# Altium PCB PCB_Stellaris.PcbDoc (part 1 of 3)
Units mm, origin at the board's own origin, x right, y up, seen from the top; angles counter-clockwise.
Board outline 50.8 x 63.5 mm, 6 copper layers (L1, L2 (GND), L3, L4, L5 (VCC), L6), stack 1.551 mm thick; 95 components, 90 nets, 373 pads, 126 vias.
Unrouted connection lines stored in the file: 1.
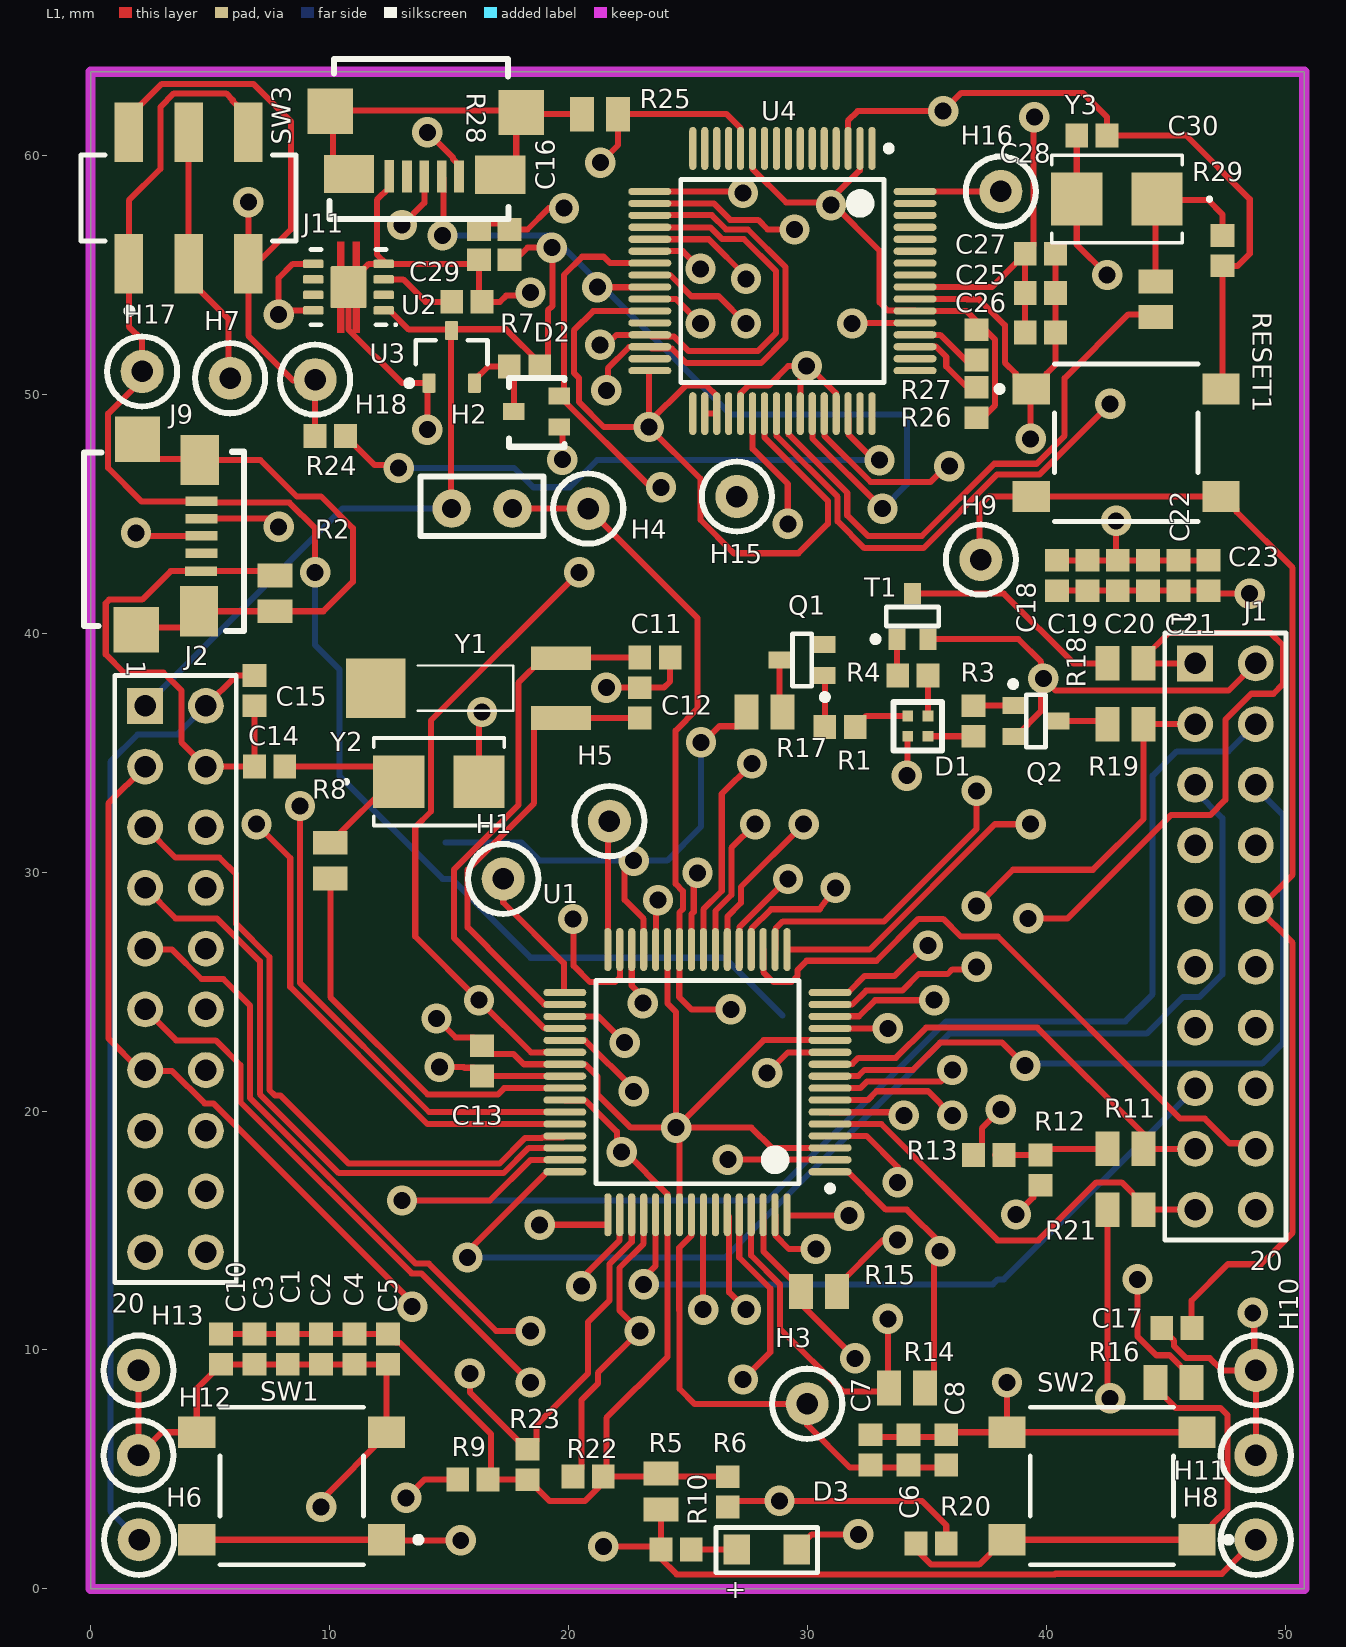
[diagram p0: L1 view]
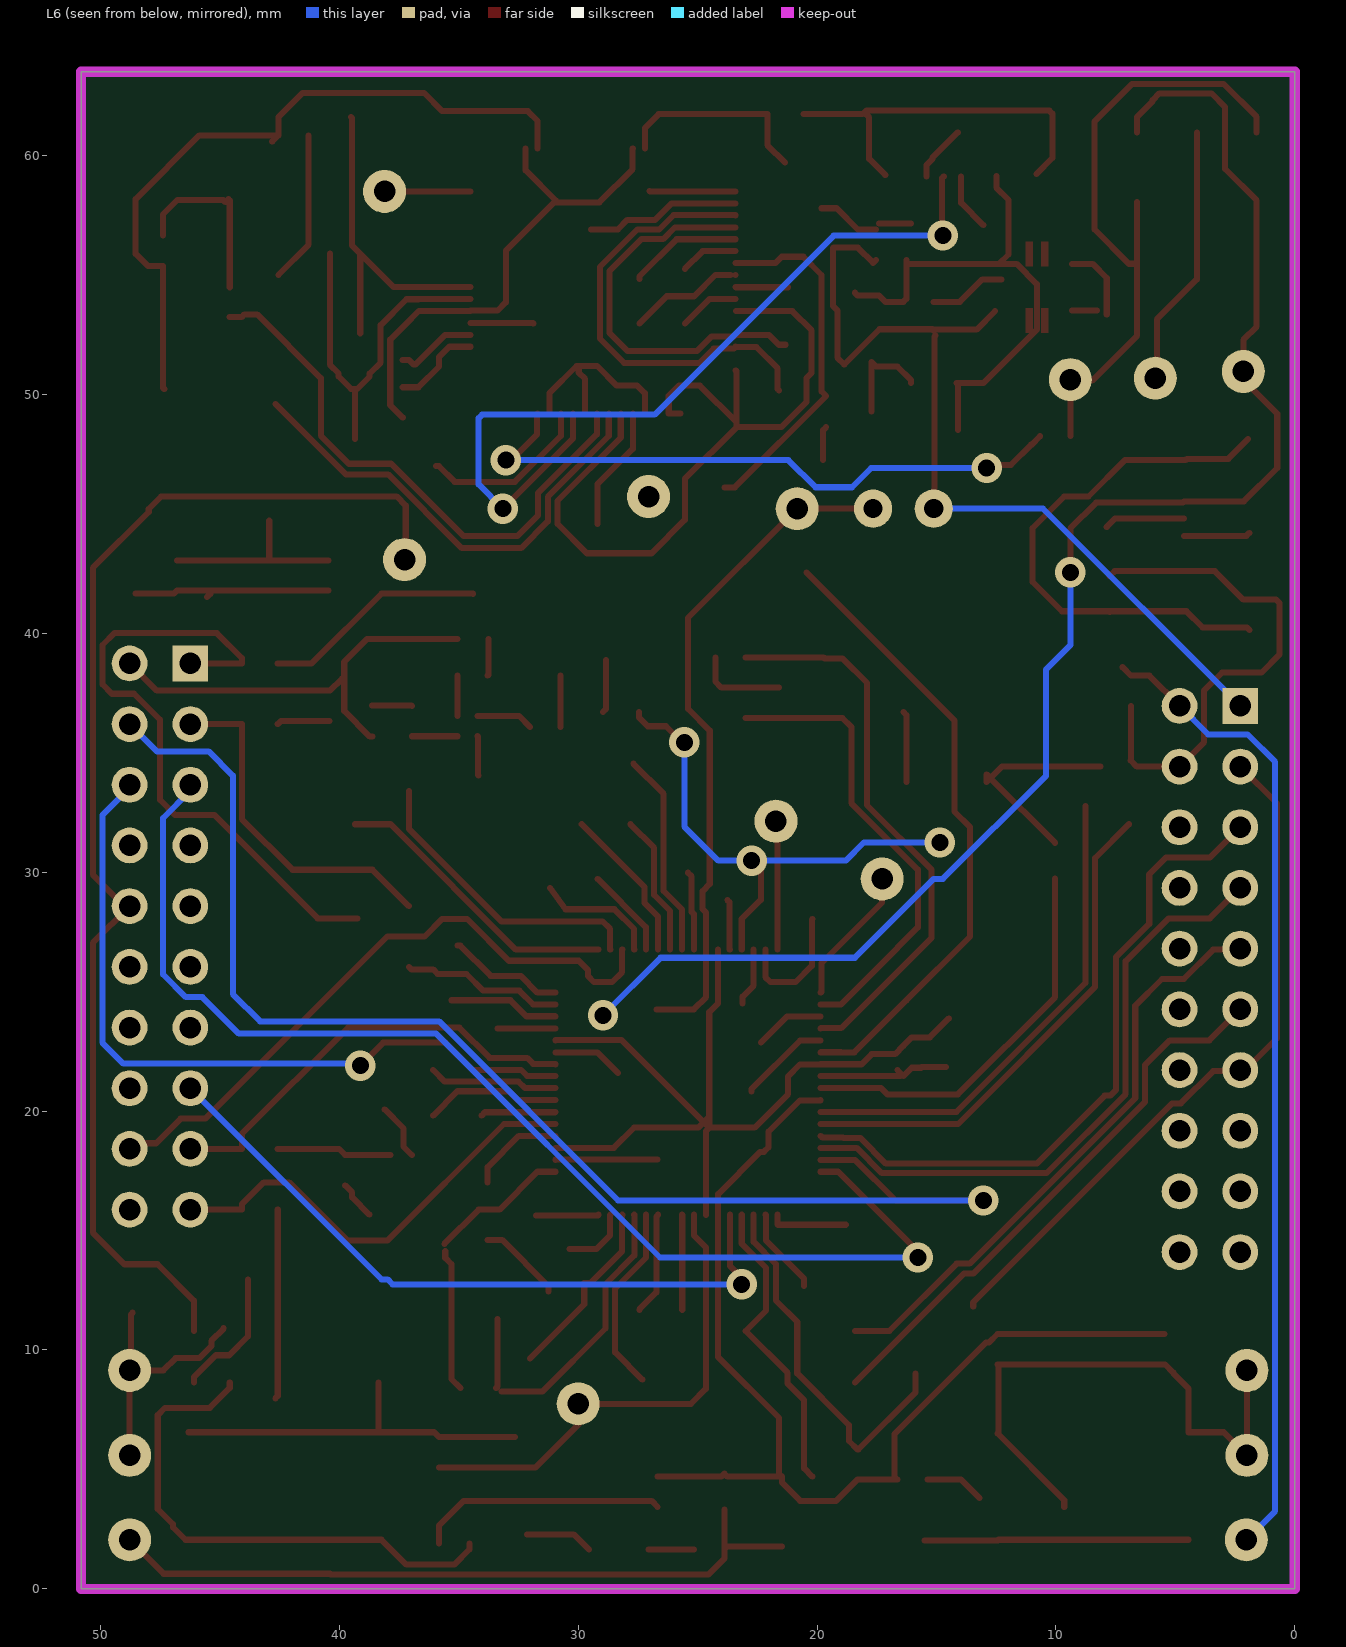
[diagram p1: L6 view, seen from below]
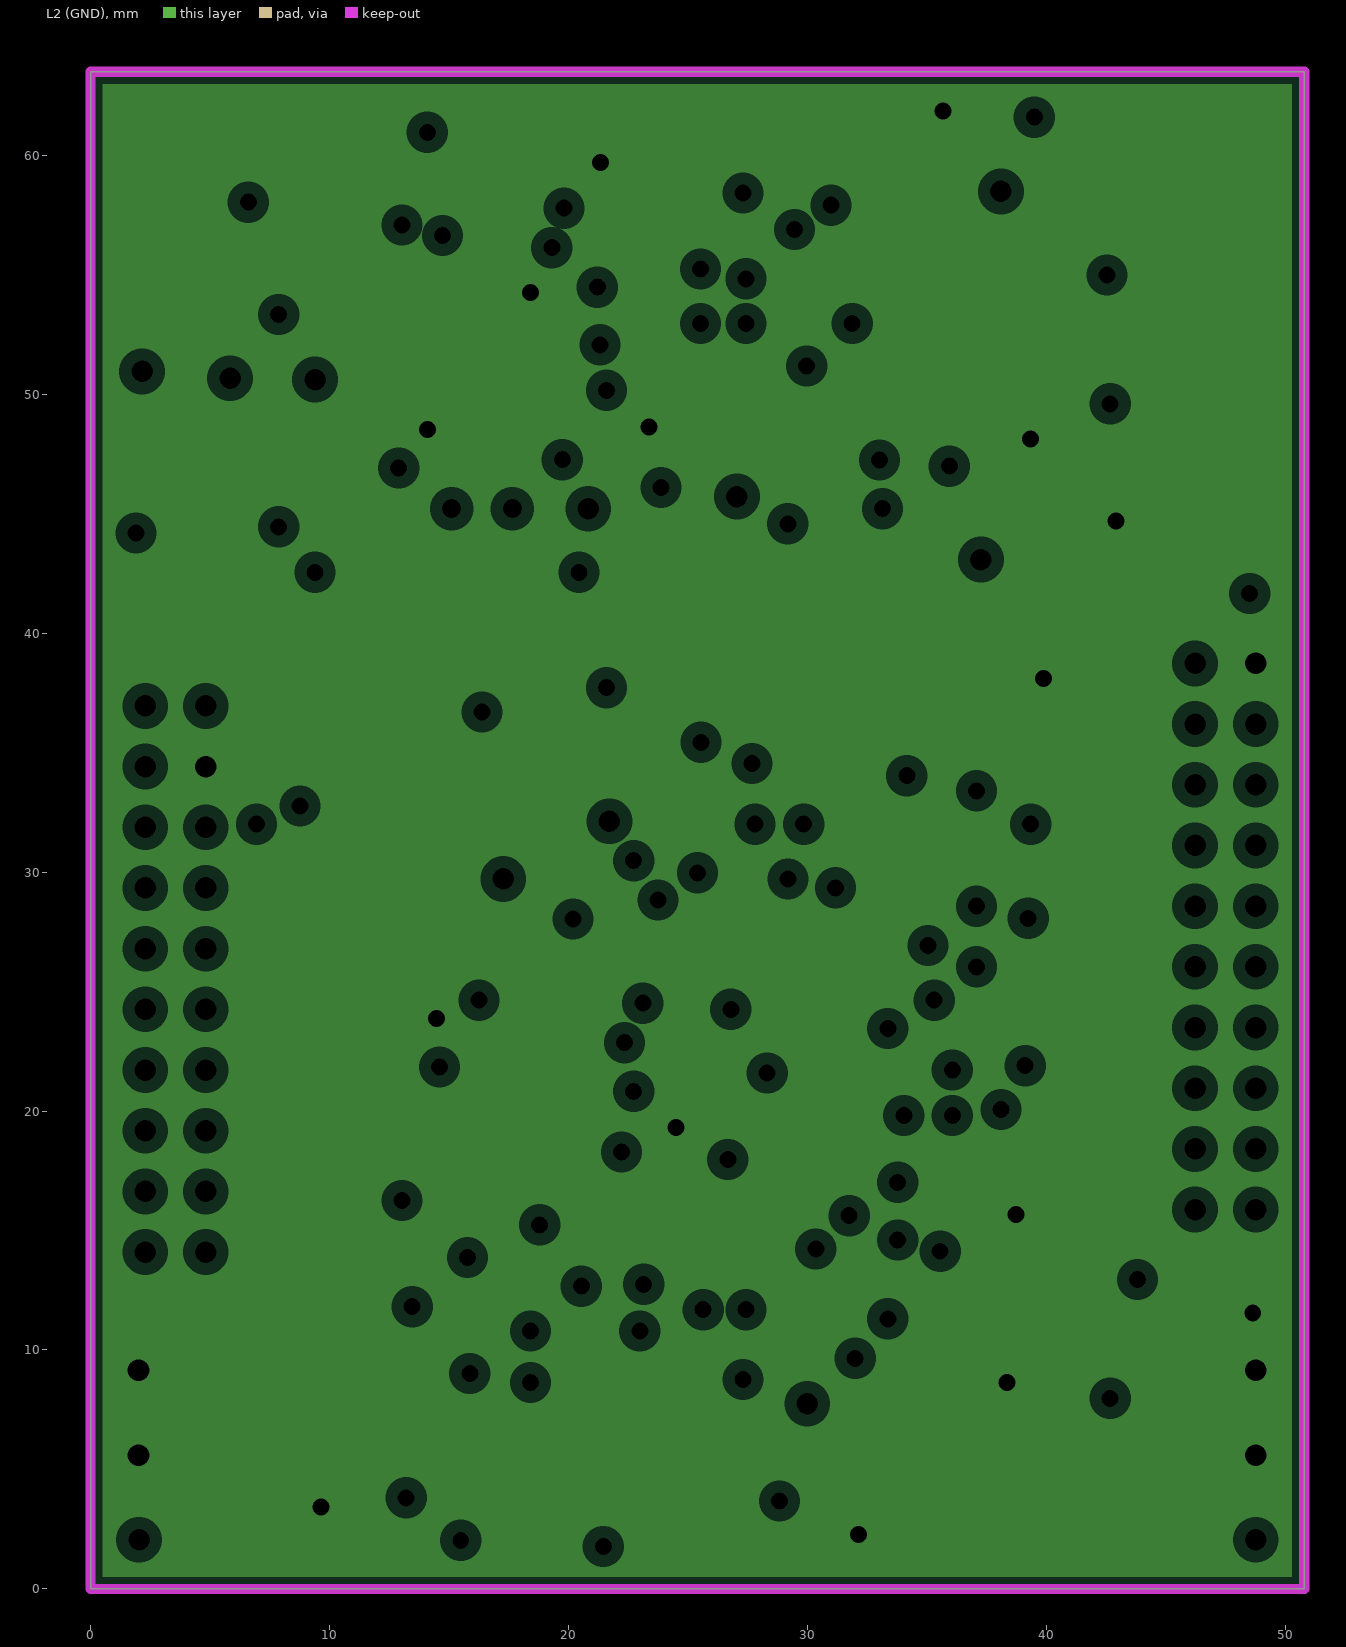
[diagram p2: L2 (GND), clearances drawn from the general rule]
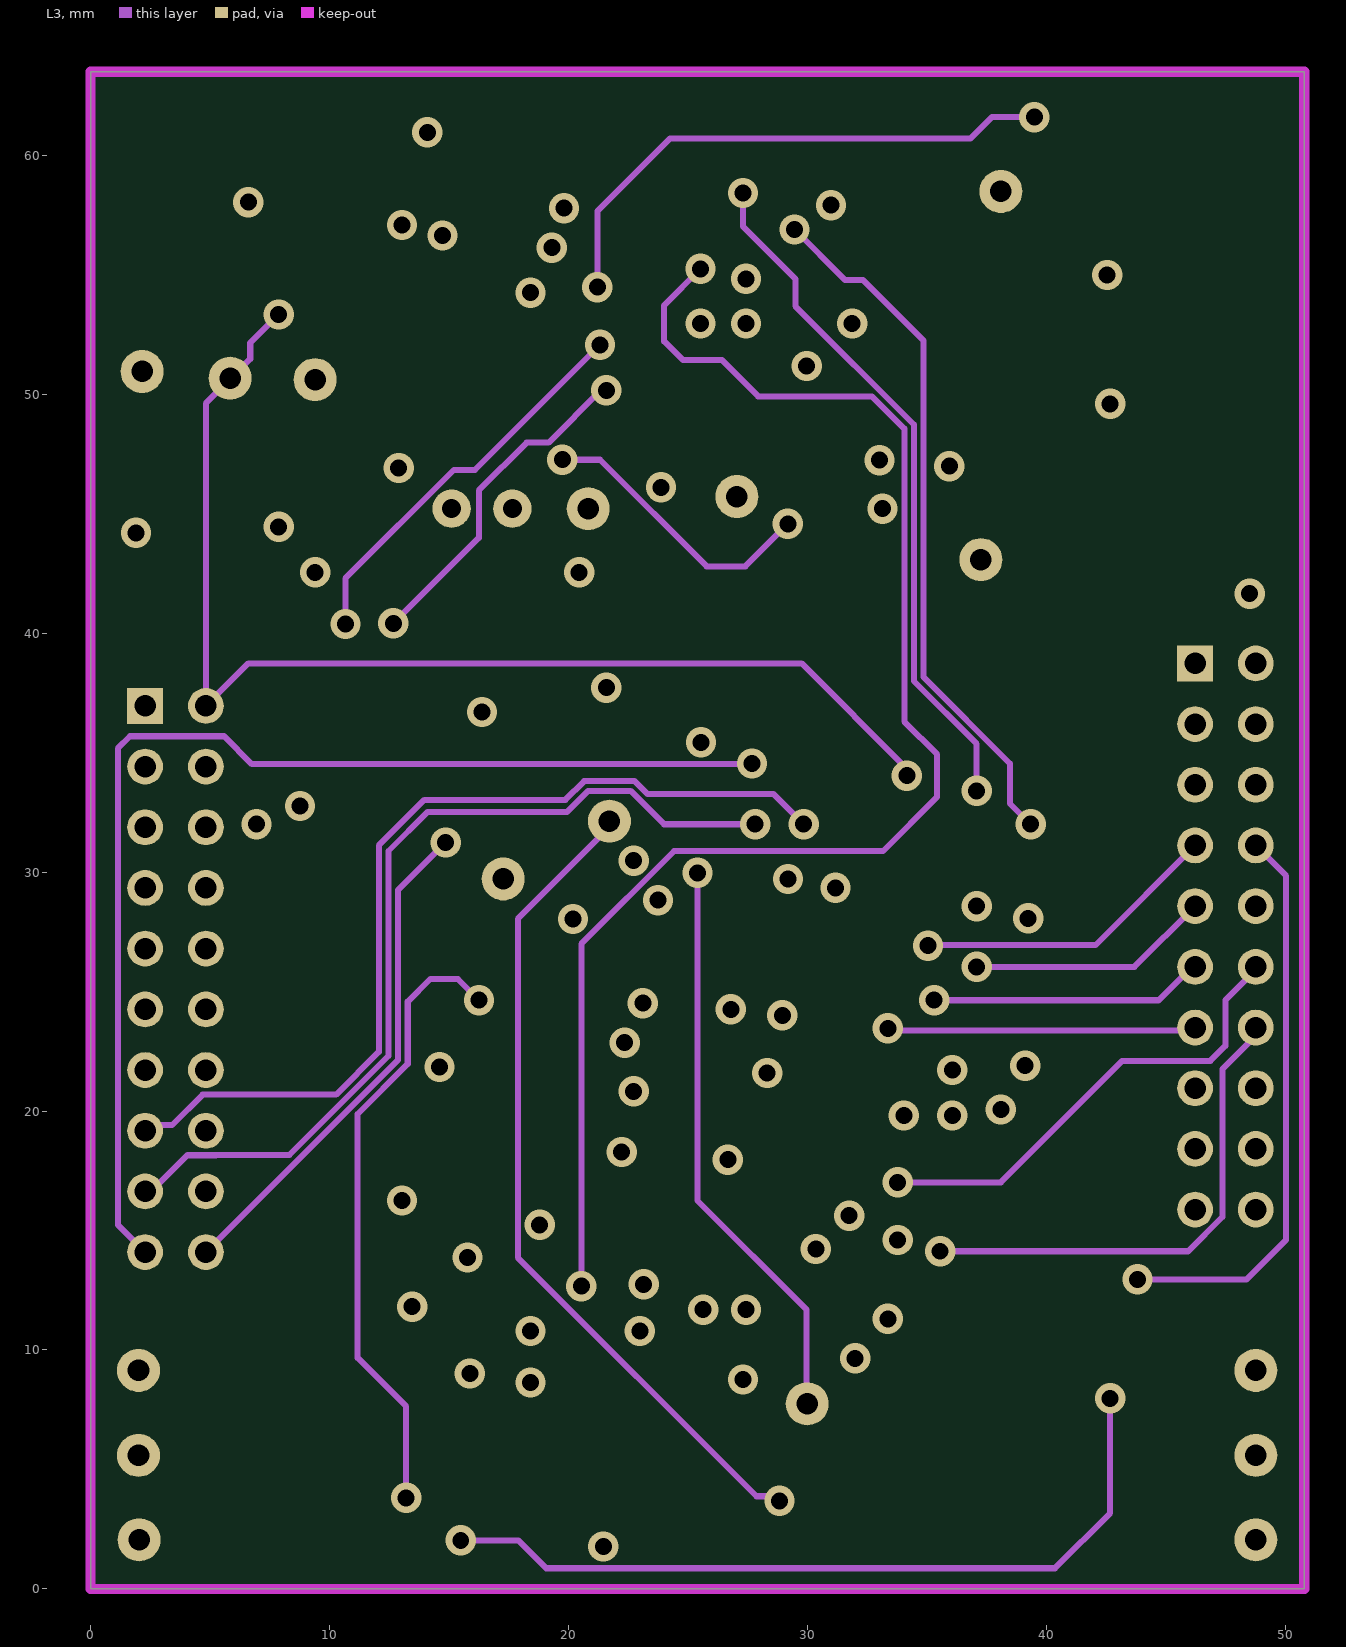
[diagram p3: L3]
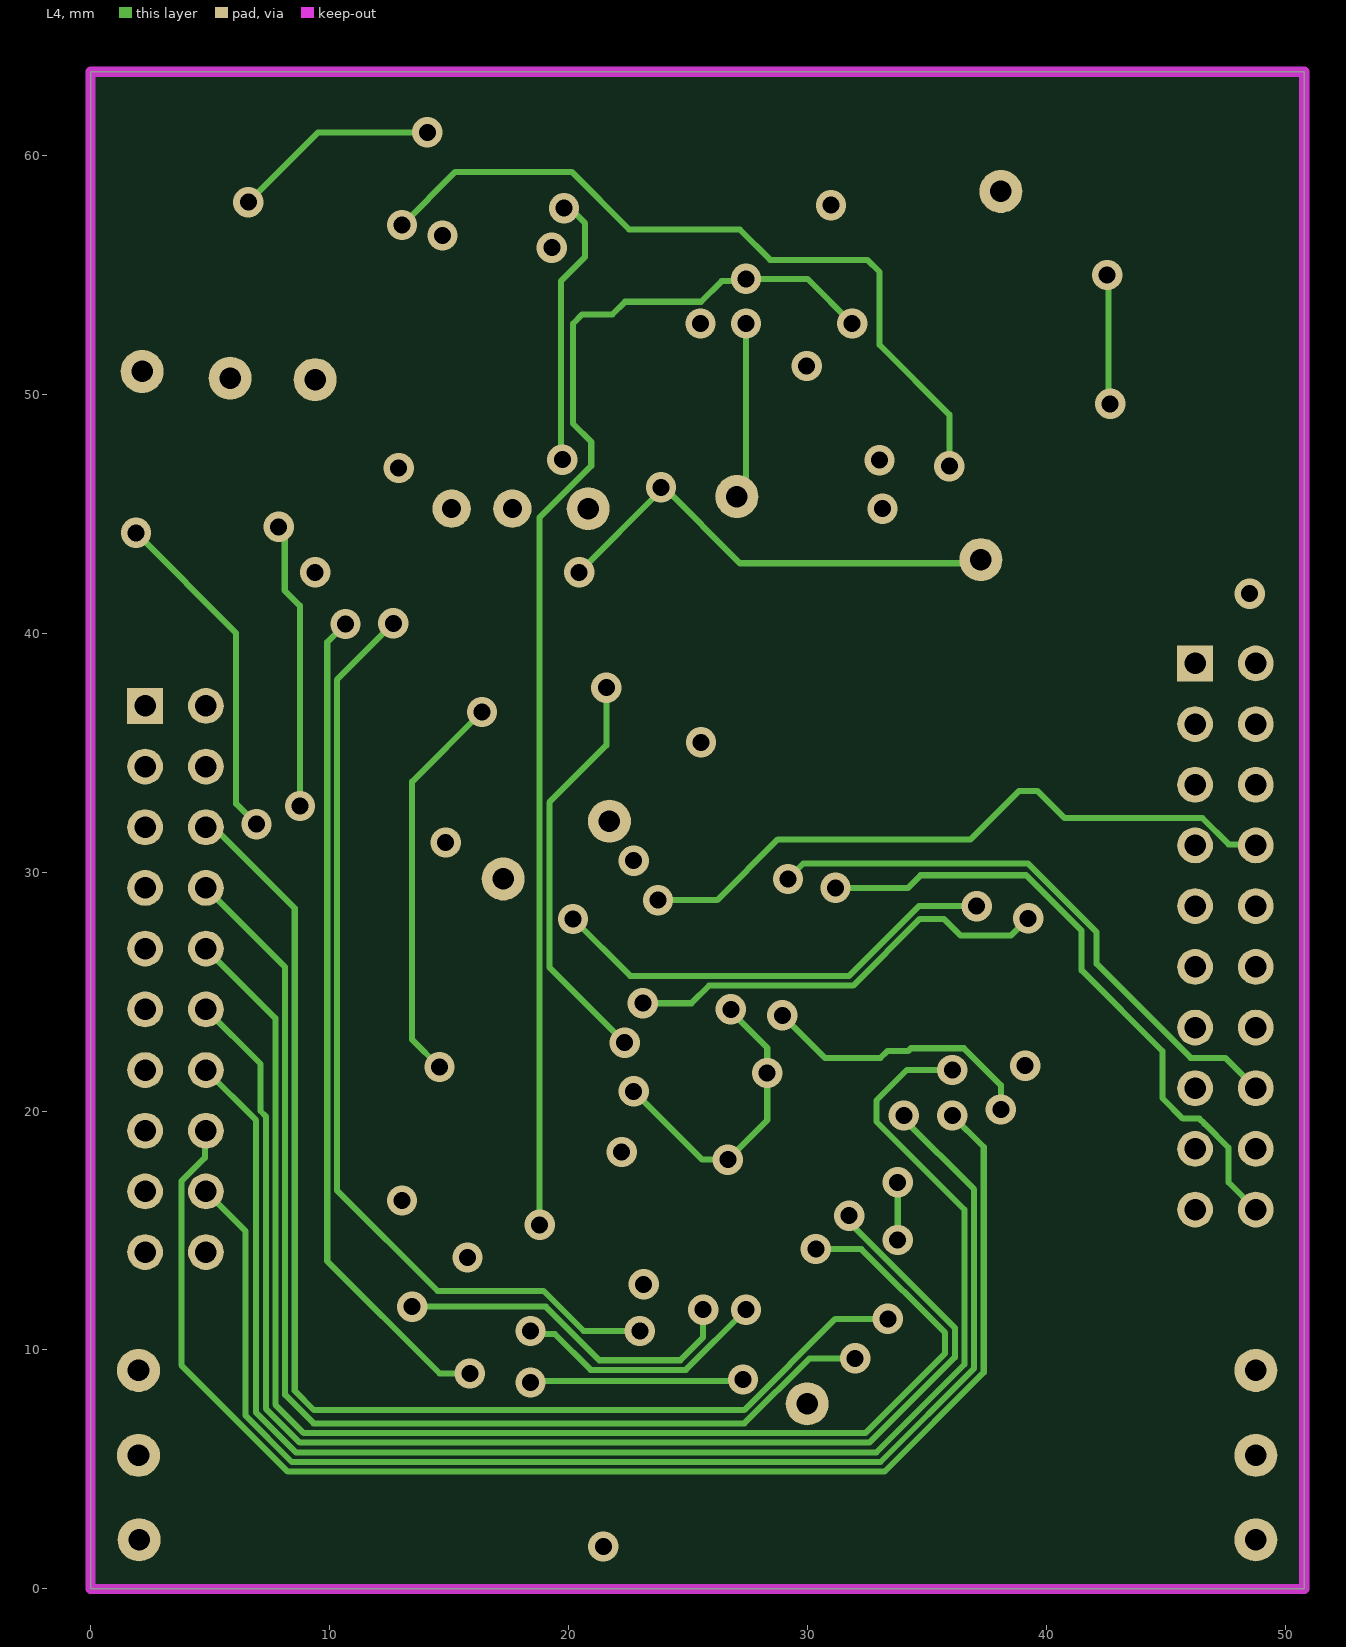
[diagram p4: L4]
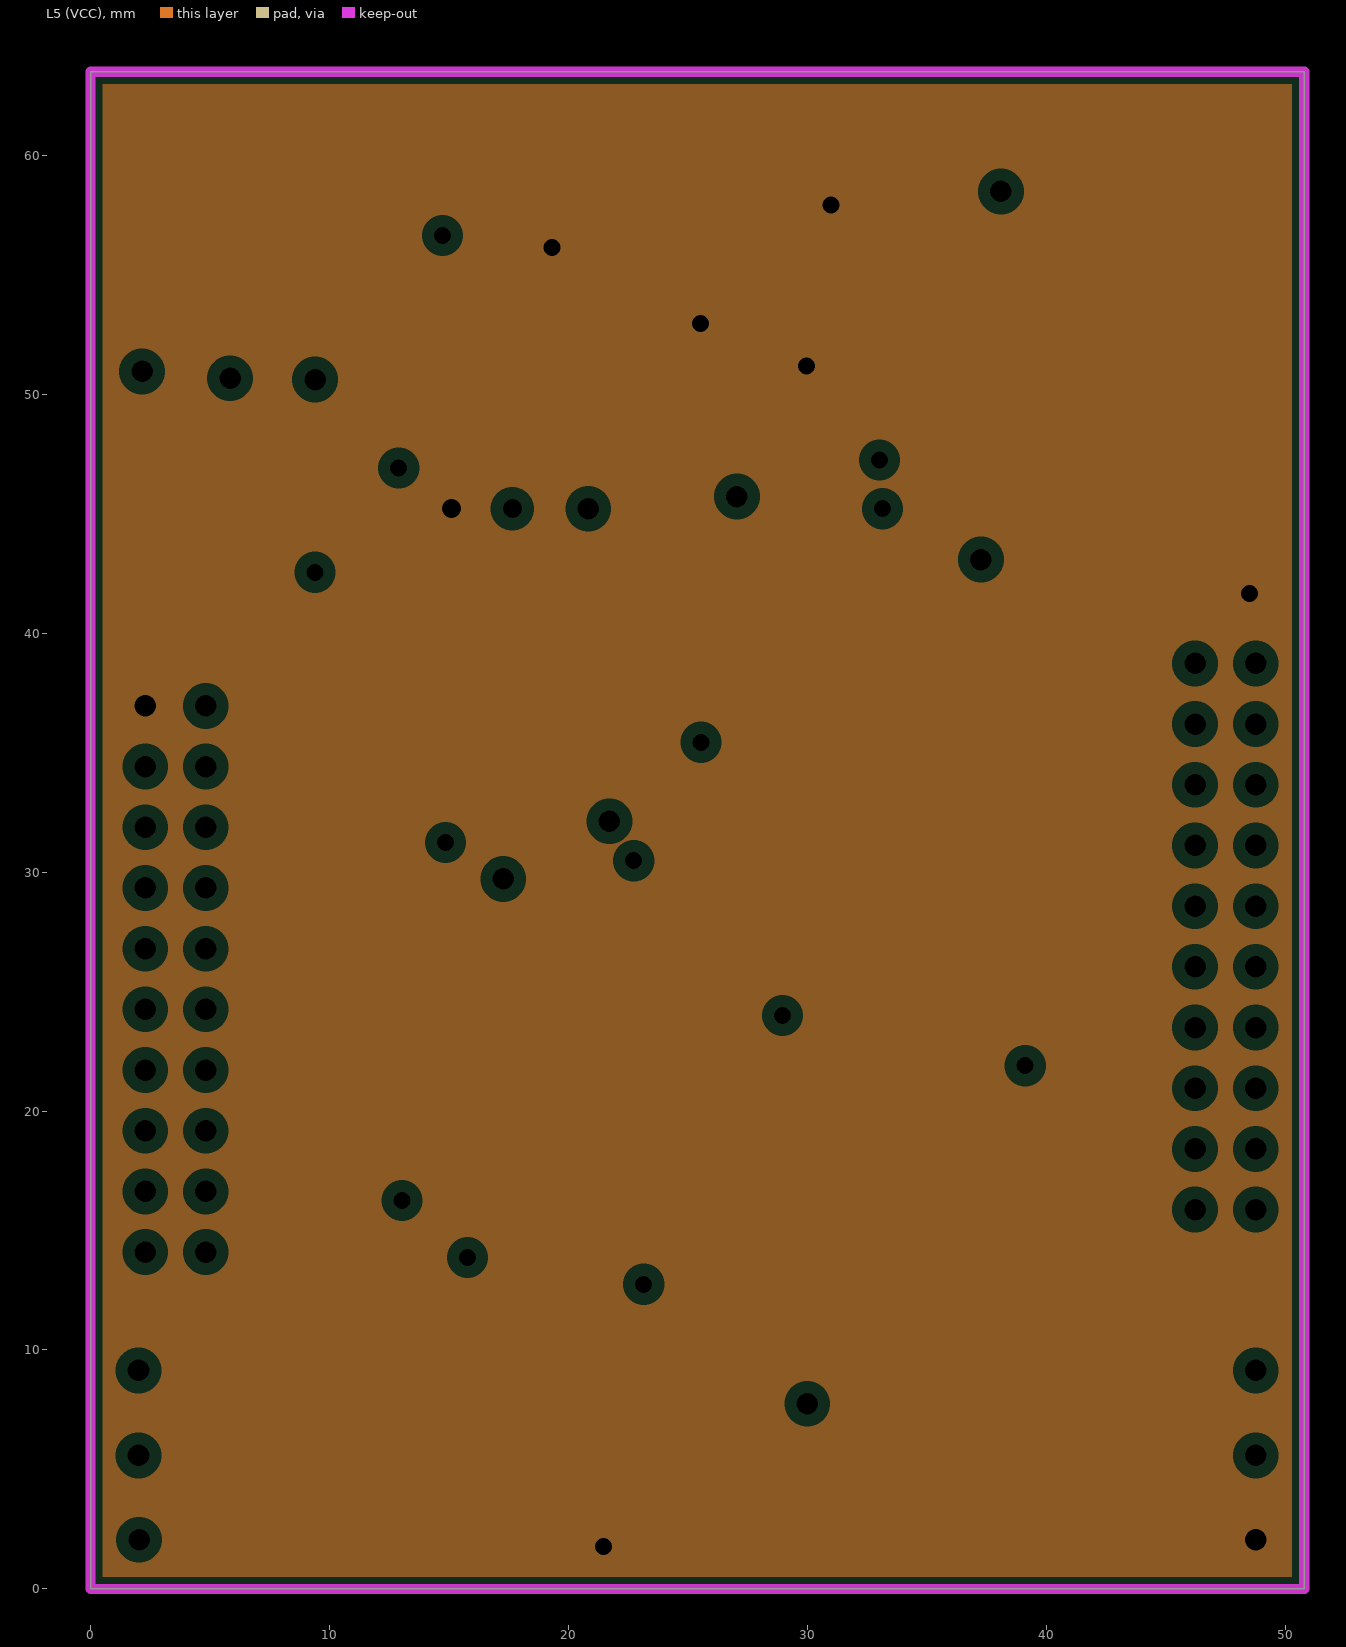
[diagram p5: L5 (VCC), clearances drawn from the general rule]
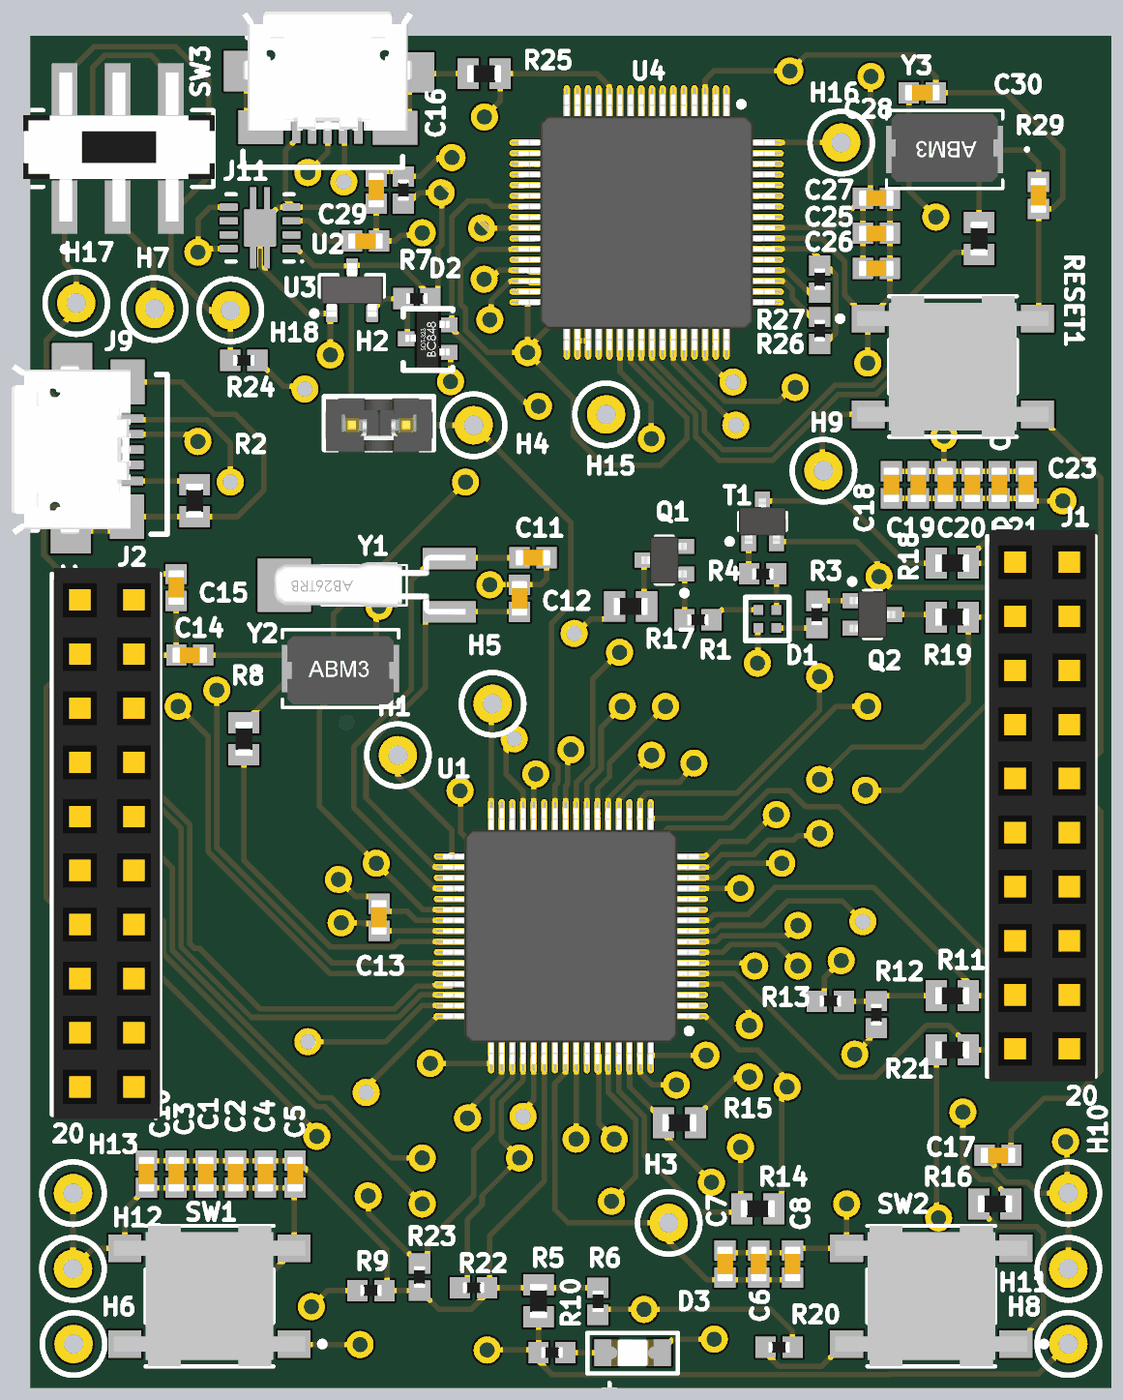
[diagram p7: 3D render of the assembled board from above, using the file's embedded part models]

## Layer stack, top to bottom
Top Solder: solder mask 0.0254, SM-001, Dk 4
L1: signal copper 0.035
Dielectric 1: prepreg 0.0711, PP-006, Dk 4.1
Dielectric 2: prepreg 0.0711, PP-006, Dk 4.1
L2 (GND): plane copper 0.035, net GND
Dielectric 3: core 0.4572, Core-035, Dk 4.7
L3: signal copper 0.035
Dielectric 4: prepreg 0.0711, PP-006, Dk 4.1
Dielectric 5: prepreg 0.0711, PP-006, Dk 4.1
L4: signal copper 0.035
Dielectric 6: core 0.4572, Core-035, Dk 4.7
L5 (VCC): plane copper 0.035, net +3.3V
Dielectric 7: prepreg 0.0711, PP-006, Dk 4.1
Dielectric 8: prepreg 0.0711, PP-006, Dk 4.1
L6: signal copper 0.035
Bottom Solder: solder mask 0.0254, SM-001, Dk 4

## Board outline
0,0 0,63.5 50.8,63.5 50.8,0

## Design rules (kind name [scope] priority, off if disabled: settings)
Clearance Clearance_1 [All] p1: gap=0.15 ignorepadtopadclearanceinfootprint=FALSE
HoleSize [All] p1: absolutevalues=TRUE maxlimit=6 minlimit=0.25 maxpercent=80.000 minpercent=20.000
Length [All] p1: maxlimit=2539.975 minlimit=0.1
MinimumAnnularRing [All] p1: minimumring=0.15
MinimumSolderMaskSliver [All] p1: minsoldermaskwidth=0.03
PlaneClearance [All] p1: clearance=0.508
PlaneConnect [All] p1: planeconnectstyle=Relief reliefexpansion=0.508 reliefentries=4 reliefconductorwidth=0.254 reliefairgap=0.254
PolygonConnect [All] p1: connectstyle=Relief reliefconductorwidth=0.254 reliefentries=4 polygonreliefangle="90 Angle" airgapwidth=0.254
RoutingVias [All] p1: holewidth=0.711 width=1.27 viastyle="Through Hole" minholewidth=0.711 minwidth=1.27 maxholewidth=0.711 maxwidth=1.27
SilkToSilkClearance [All] p1: silktosilkclearance=0
SilkToSolderMaskClearance [IsPad] p1: minsilkscreentomaskgap=0.03 clearancetoexposedcopper=TRUE
SolderMaskExpansion [All] p1: expansion=0.102
UnRoutedNet [All] p1: checkbadconnections=TRUE
Width [All] p1: maxlimit=0.254 minlimit=0.254 preferedwidth=0.254
23 further rules are at their usual default settings.

## Classes and differential pairs
component class ESQUEMATICOS2: C9 C18 C19 C20 C21 C22 C23 C25 C26 C27 C28 C29 C30 H15 H16 H17 H18 R22 R23 R24 R25 R26 R27 R28 R29 SW3 U4 U? Y3
component class ESQUEMATICOS1: * C1 C2 C3 C4 C5 C6 C7 C8 C10 C11 C12 C13 C14 C15 C16 C17 D1 D2 D3 H1 H2 H3 H4 H5 H6 H7 H8 H9 H10 H11 H12 H13 J1 J2 J9 Q1 Q2 R1 R2 R3 R4 R5 R6 R7 R8 R9 R10 R11 R12 R13 R14 R15 R16 R17 R18 R19 R20 R21 R30 R31 RESET1 SW1 SW2 T1 U1 U2 U3 Y1 Y2

## Components (designator, comment, footprint, x,y, rotation, side; value= is the part's Value field where it differs from the comment)
C1 "0.01uF" "CAP 0402" 8.255,10.033 r90 top
C2 "0.1uF" "CAP 0402" 9.652,10.033 r90 top
C3 "0.01uF" "CAP 0402" 6.858,10.033 r90 top
C4 "0.1uF" "CAP 0402" 11.049,10.033 r90 top
C5 "0.01uF" "CAP 0402" 12.446,10.033 r90 top
C6 "0.1uF" "CAP 0402" 34.227,5.819 r90 top
C7 "0.1uF" "CAP 0402" 32.639,5.819 r90 top
C8 "1.0uF" "CAP 0402" 35.814,5.819 r90 top
C10 "1.0uF" "CAP 0402" 5.461,10.033 r90 top
C11 "24pF" "CAP 0402" 23.622,38.989 r0 top
C12 "24pF" "CAP 0402" 22.987,37.084 r270 top
C13 "10pF" "CAP 0402" 16.383,22.098 r270 top
C14 "10pF" "CAP 0402" 7.493,34.417 r0 top
C15 "1.0uF" "CAP 0402" 6.858,37.592 r90 top
C16 "0.01uF" "CAP 0402" 15.748,53.869 r180 top
C17 "0.1uF" "CAP 0402" 45.466,10.922 r0 top
C18 "1.0uF" "CAP 0402" 40.457,42.413 r270 top
C19 "0.01uF" "CAP 0402" 41.724,42.413 r270 top
C20 "0.1uF" "CAP 0402" 42.991,42.413 r270 top
C21 "0.01uF" "CAP 0402" 44.258,42.413 r270 top
C22 "0.1uF" "CAP 0402" 45.525,42.413 r270 top
C23 "0.01uF" "CAP 0402" 46.792,42.413 r270 top
C25 "1.0uF" "CAP 0402" 39.751,54.229 r0 top
C26 "0.1uF" "CAP 0402" 39.751,52.578 r0 top
C27 "0.1uF" "CAP 0402" 39.751,55.88 r0 top
C28 "10pF" "CAP 0402" 41.91,60.833 r180 top
C29 "0.1uF" "CAP 0402" 16.256,56.261 r90 top
C30 "10pF" "CAP 0402" 47.371,56.007 r90 top
D1 "18-038/RSGHBHC1-S02/2T" 18-038/RSGHBHC1-S02/2T 34.627,36.112 r90 top
D2 "A1/A2" BAS70W-05-7-F 18.669,49.276 r90 top
D3 "GREEN" LTST-C171GKT 28.301,1.651 r0 top
H1 "Single Head" CONNECTOR 17.272,29.689 r0 top
H2 "961102-6404-AR" "HEADER 2 PIN" 17.653,45.212 r180 top
H3 "Single Head" CONNECTOR 29.993,7.722 r0 top
H4 "Single Head" CONNECTOR 20.828,45.187 r0 top
H5 "Single Head" CONNECTOR 21.717,32.106 r0 top
H6 "Single Head" CONNECTOR 2.032,2.032 r0 top
H7 "Single Head" CONNECTOR 5.842,50.648 r0 top
H8 "Single Head" CONNECTOR 48.768,2.032 r0 top
H9 "Single Head" CONNECTOR 37.262,43.053 r0 top
H10 "Single Head" CONNECTOR 48.793,9.144 r90 top
H11 "Single Head" CONNECTOR 48.793,5.588 r90 top
H12 "Single Head" CONNECTOR 2.032,5.588 r90 top
H13 "Single Head" CONNECTOR 2.032,9.144 r90 top
H15 "Single Head" CONNECTOR 27.051,45.695 r0 top
H16 "Single Head" CONNECTOR 38.1,58.462 r0 top
H17 "Single Head" CONNECTOR 2.159,50.927 r0 top
H18 "Single Head" CONNECTOR 9.398,50.587 r0 top
J1 "SSW-110-23-S-D" H2-2X10 46.228,38.735 r270 top
J2 "SSW-110-23-S-D" H2-2X10 2.286,36.957 r270 top
J9 "ZX62-B-5PA(11)" "Micro USB 2.0 Type B" 3.302,44.069 r270 top
J11 "ZX62-B-5PA(11)" "Micro USB 2.0 Type B" 13.97,60.452 r180 top
Q1 "NPN SC70" SOT130P220X90-3N 29.784,38.877 r180 top
Q2 "NPN SC70" SOT130P220X90-3N 39.563,36.322 r0 top
R1 "RES" "RES 0402" 31.369,36.068 r0 top
R2 "RES" "RES 0603" 7.722,41.669 r90 top
R3 "RES" "RES 0402" 36.957,36.322 r270 top
R4 "RES" "RES 0402" 34.417,38.227 r0 top
R5 "RES" "RES 0603" 23.876,4.076 r90 top
R6 "RES" "RES 0402" 26.67,4.064 r270 top
R7 "RES" "RES 0402" 18.161,51.16 r0 top
R8 "RES" "RES 0603" 10.037,30.48 r270 top
R9 "RES" "RES 0402" 16.002,4.572 r0 top
R10 "RES" "RES 0402" 24.511,1.651 r180 top
R11 "RES" "RES 0603" 43.319,18.415 r180 top
R12 "RES" "RES 0402" 39.751,17.526 r90 top
R13 "RES" "RES 0402" 37.592,18.161 r180 top
R14 "RES" "RES 0603" 34.175,8.411 r0 top
R15 "RES" "RES 0603" 30.492,12.446 r0 top
R16 "RES" "RES 0603" 45.327,8.636 r180 top
R17 "RES" "RES 0603" 28.206,36.703 r0 top
R18 "RES" "RES 0603" 43.319,38.735 r180 top
R19 "RES" "RES 0603" 43.319,36.195 r180 top
R20 "RES" "RES 0402" 35.179,1.905 r180 top
R21 "RES" "RES 0603" 43.319,15.875 r180 top
R22 "RES" "RES 0402" 20.828,4.699 r0 top
R23 "RES" "RES 0402" 18.288,5.207 r270 top
R24 "RES" "RES 0402" 10.033,48.26 r180 top
R25 "RES" "RES 0603" 21.324,61.722 r0 top
R26 "RES" "RES 0402" 37.084,52.07 r90 top
R27 "RES" "RES 0402" 37.084,49.657 r270 top
R28 "RES" "RES 0402" 17.526,56.261 r270 top
R29 "RES" "RES 0603" 44.577,53.975 r270 top
RESET1 "B3S-1000" B3S-1000 43.345,47.97 r0 top
SW1 "B3S-1000" B3S-1000 8.42,4.307 r180 top
SW2 "B3S-1000" B3S-1000 42.329,4.307 r180 top
SW3 "JS202011SCQN" JS202011SCQN 4.104,58.21 r0 top
T1 "NPN SC70" SOT130P220X90-3N 34.402,40.701 r90 top
U1 "LM4F120H5QRFIG" LM4F120H5QRFIG 25.4,21.209 r180 top
U2 "TLV803" TLV803MDBZR 15.113,51.562 r90 top
U3 "Regulator" TPS73633DRBT 10.795,54.483 r180 top
U4 "LM4F120H5QRFIG" LM4F120H5QRFIG 28.956,54.737 r270 top
Y1 "32.768Khz" AB26TRB-32.768KHZ-T 14.685,37.699 r0 top
Y2 "16MHz" ABM3-16.000MHZ-B2-T 14.577,33.706 r0 top
Y3 "16MHz" ABM3-16.000MHZ-B2-T 42.954,58.242 r180 top

## Footprints (in the part's own frame and the unit in brackets; to place one, negate y for a bottom-side part, rotate by r counter-clockwise, add the part's x,y. Pads: shape width x height; smd on the part's side, far side on the other; paste and mask are expansions set on the pad)
18-038/RSGHBHC1-S02/2T [mm] "LED Tri-Color Blue/Green/Red 475nm/531nm/631nm Chip LED 4-Pin SMD T/R"
  rect 0.45x0.45 smd: 1(-0.425,0.425) 2(0.425,0.425) 3(-0.425,-0.425) 4(0.425,-0.425)
  silkscreen extent -1.02,-1.02 1.02,1.02, body extent -0.89,-0.89 0.89,0.89, height 0.5
AB26TRB-32.768KHZ-T [mm] "Crystal, Cylindrical 32.768Khz, 12.5F, 20Ppm, 2 X 6 Formed Lead Smd Rohs Compliant: Yes"
  rect 2.5x1 smd: 1(5,-1.25) 2(5,1.25)
  rect 2.5x2.5 smd: ""(-2.75,0)
  silkscreen extent -1,-0.95 3,0.95, body extent -3.23,-1.4 5.77,1.44, height 2.57
ABM3-16.000MHZ-B2-T [mil] "Crystal 16MHz ±20ppm (Tol) ±50ppm (Stability) 18pF FUND 40Ohm 2-Pin Mini-CSMD T/R"
  rect 84.59x87 smd paste+0 mask+0: 1(-66.11,3) 2(66.11,3)
  silkscreen extent -155,-69 108,75, body extent -98,-63 98,63, height 203
B3S-1000 [mm] "Switch Tactile N.O. SPST Round Button Gull Wing 0.05A 24VDC 500000Cycles 1.57N SMD Bag"
  rect 1.55x1.3 smd: 1(-3.975,2.25) 2(3.975,2.25) 3(-3.975,-2.25) 4(3.975,-2.25)
  silkscreen extent -5.42,-3.3 3,3.3, body extent -4.5,-3.3 4.5,3.3, height 4.4
BAS70W-05-7-F [mm]
  rect 0.7x0.9 smd: 1(-0.65,-0.95) 2(0.65,-0.95) 3(0,0.95)
  silkscreen extent -1.48,-1.17 1.4,1.15, body extent -1.33,-1.05 1.27,1.05, height 0.91
"CAP 0402" [mm] "Empaquetado 0402 para capacitor"
  rect 0.95x1 smd: 1(-0.635,0) 2(0.635,0)
  body extent -0.82,-0.38 0.82,0.38, height 0.35
CONNECTOR [mm]
  round 1.8 hole 0.9: 1(0,0.025)
  silkscreen extent -1.47,-1.44 1.47,1.49
H2-2X10 [mm] "Header 2X10"
  rect 1.5x1.5 hole 0.9: 1(0,0)
  round 1.5 hole 0.9: 2(2.54,0) 3(5.08,0) 4(7.62,0) 5(10.16,0) 6(12.7,0) 7(15.24,0) 8(17.78,0) 9(20.32,0) 10(22.86,0) 11(0,2.54) 12(2.54,2.54) 13(5.08,2.54) 14(7.62,2.54) 15(10.16,2.54) 16(12.7,2.54) 17(15.24,2.54) 18(17.78,2.54) 19(20.32,2.54) 20(22.86,2.54)
  silkscreen extent -1.27,-1.27 24.13,3.81, body extent -1.56,-1.19 24.34,3.81, height 8.5
"HEADER 2 PIN" [mm]
  round 1.6 hole 0.8: 1(0,0) 2(2.54,0)
  silkscreen extent -1.3,-1.35 3.84,1.14, body extent -1.27,-3.23 3.81,1.27, height 8.72
JS202011SCQN [mm] "C&k Components JS202011SCQN / Switch Slide DPDT 6VDC 0.3A SMT"
  rect 1.2x2.5 smd paste+0 mask+0: 1(-2.5,-2.75) 2(0,-2.75) 3(2.5,-2.75) 4(-2.5,2.75) 5(0,2.75) 6(2.5,2.75)
  silkscreen extent -4.5,-4.85 4.5,1.8, body extent -4.44,-3.44 4.56,3.56, height 5.65
LM4F120H5QRFIG [mm] "MCU 32-bit Stellaris ARM Cortex M4F RISC 256KB Flash 1.2V/3.3V 64-Pin LQFP Tray"
  oval 1.8x0.3 smd paste-0.102 mask+0.051: 1(-5.55,3.75) 2(-5.55,3.25) 3(-5.55,2.75) 4(-5.55,2.25) 5(-5.55,1.75) 6(-5.55,1.25) 7(-5.55,0.75) 8(-5.55,0.25) 9(-5.55,-0.25) 10(-5.55,-0.75) 11(-5.55,-1.25) 12(-5.55,-1.75) 13(-5.55,-2.25) 14(-5.55,-2.75) 15(-5.55,-3.25) 16(-5.55,-3.75) 33(5.55,-3.75) 34(5.55,-3.25) 35(5.55,-2.75) 36(5.55,-2.25) 37(5.55,-1.75) 38(5.55,-1.25) 39(5.55,-0.75) 40(5.55,-0.25) 41(5.55,0.25) 42(5.55,0.75) 43(5.55,1.25) 44(5.55,1.75) 45(5.55,2.25) 46(5.55,2.75) 47(5.55,3.25) 48(5.55,3.75)
  oval 0.3x1.8 smd paste-0.102 mask+0.051: 17(-3.75,-5.55) 18(-3.25,-5.55) 19(-2.75,-5.55) 20(-2.25,-5.55) 21(-1.75,-5.55) 22(-1.25,-5.55) 23(-0.75,-5.55) 24(-0.25,-5.55) 25(0.25,-5.55) 26(0.75,-5.55) 27(1.25,-5.55) 28(1.75,-5.55) 29(2.25,-5.55) 30(2.75,-5.55) 31(3.25,-5.55) 32(3.75,-5.55) 49(3.75,5.55) 50(3.25,5.55) 51(2.75,5.55) 52(2.25,5.55) 53(1.75,5.55) 54(1.25,5.55) 55(0.75,5.55) 56(0.25,5.55) 57(-0.25,5.55) 58(-0.75,5.55) 59(-1.25,5.55) 60(-1.75,5.55) 61(-2.25,5.55) 62(-2.75,5.55) 63(-3.25,5.55) 64(-3.75,5.55)
  silkscreen extent -5.68,-4.25 4.25,4.57, body extent -6.01,-6.01 6.01,6.01, height 1.5
LTST-C171GKT [mm]
  rect 1.1x1.25 smd: 1(-1.25,0) 2(1.25,0)
  silkscreen extent -2.12,-0.97 2.12,0.92, body extent -1,-0.64 1,0.61, height 1
"Micro USB 2.0 Type B" [mm]
  rect 0.4x1.35 smd: 1(-1.45,1.338) 2(-0.725,1.338) 3(0,1.338) 4(0.725,1.338) 5(1.475,1.325)
  rect 2.1x1.6 smd: 6(-3.175,1.27) 7(3.15,1.238)
  rect 1.9x1.9 smd: 8(-4.05,-1.337) 9(3.933,-1.397)
  silkscreen extent -3.52,-3.57 3.98,3.13, body extent -4.04,-4.19 4.04,1.41, height 2.76
"RES 0402" [mm] "Chip Resistor, 2-Leads, Body 1.50x0.60mm, IPC Medium Density"
  rect 0.95x1 smd: 1(-0.635,0) 2(0.635,0)
  body extent -0.51,-0.25 0.51,0.25, height 0.36
"RES 0603" [mm]
  rect 1x1.45 smd: 1(-0.75,0) 2(0.75,0)
  body extent -0.8,-0.4 0.8,0.4, height 0.46
SOT130P220X90-3N [mm] "SOT223, 3-Leads, Body 2.00x2.20mm (avg), Pitch 1.30mm, IPC Medium Density"
  rect 0.9x0.7 smd: 1(-0.95,0.65) 2(-0.95,-0.65) 3(0.95,0)
  silkscreen extent -1.08,-1.1 0.4,1.67, body extent -1.06,-1.1 1.06,1.1, height 0.9
TLV803MDBZR [mm] "3-pin voltage supervisor (reset IC) with active-low and open-drain reset 3-SOT-23 -40 to 125"
  rrect18% 0.8x0.55 smd: 1(-1.1,0.95) 2(-1.1,-0.95) 3(1.1,0)
  silkscreen extent -1.22,-1.5 0.7,1.9, body extent -1.26,-1.46 1.26,1.46, height 0.96
TPS73633DRBT [mm] "LDO Regulator Pos 3.3V 0.4A 8-Pin VSON EP T/R"
  rrect29% 0.85x0.35 smd: 1(-1.475,0.975) 2(-1.475,0.325) 3(-1.475,-0.325) 4(-1.475,-0.975) 5(1.475,-0.975) 6(1.475,-0.325) 7(1.475,0.325) 8(1.475,0.975)
  rrect7% 1.5x1.75 smd: 9(0,0)
  L1 region: -0.185,0.875 -0.185,1.9 -0.465,1.9 -0.465,0.875
  L1 region: 0.185,-0.875 0.185,-1.9 0.465,-1.9 0.465,-0.875
  L1 region: -0.185,-0.875 -0.185,-1.9 -0.465,-1.9 -0.465,-0.875
  L1 region: 0.185,0.875 0.185,1.9 0.465,1.9 0.465,0.875
  silkscreen extent -2.02,-1.58 1.57,1.62, body extent -1.5,-1.5 1.5,1.5, height 1

## Part data
C1 C3 C5 C16 C19 C21 C23: library part TMK105B7103KV-F, "0402 0.01 uF 25 V ±10% X7R Automotive Multilayer Ceramic Capacitor", Capacitance=10nF, Case/Package=0402, Case Code (Metric)=1005, Dielectric=X7R, Manufacturer="Taiyo Yuden", Max Operating Temperature=125°C, Min Operating Temperature=-55°C, Package Quantity=1, Resistor Type=Ceramic, Supplier Part Number 1=587-1223-1-ND, Tolerance=10%, Voltage=25V, Case Code (Imperial)=0402, ComponentLink1Description=https://datasheet.ciiva.com/129/tmk105b7103kv-f-ss-129699.pdf?src-supplier=Digi-Key, ComponentLink1URL=https://datasheet.ciiva.com/129/tmk105b7103kv-f-ss-129699.pdf?src-supplier=Digi-Key, ComponentLink2Description=https://datasheet.ciiva.com/30192/438tmk105b7103kv-f-30192315.pdf?src-supplier=Onlinecomponents.com, ComponentLink2URL=https://datasheet.ciiva.com/30192/438tmk105b7103kv-f-30192315.pdf?src-supplier=Onlinecomponents.com, ComponentLink3Description=https://datasheet.ciiva.com/15922/204tmk105b7103kv-f-15922348.pdf?src-supplier=Onlinecomponents.com, ComponentLink3URL=https://datasheet.ciiva.com/15922/204tmk105b7103kv-f-15922348.pdf?src-supplier=Onlinecomponents.com, ComponentLink4Description=https://datasheet.ciiva.com/30156/190tmk105b7103kv-f-30156174.pdf?src-supplier=Onlinecomponents.com, ComponentLink4URL=https://datasheet.ciiva.com/30156/190tmk105b7103kv-f-30156174.pdf?src-supplier=Onlinecomponents.com, ComponentLink5Description=https://datasheet.ciiva.com/28645/746258-28645254.pdf?src-supplier=Element14, ComponentLink5URL=https://datasheet.ciiva.com/28645/746258-28645254.pdf?src-supplier=Element14, ComponentLink6Description=https://datasheet.ciiva.com/7975/746258-7975835.pdf?src-supplier=Element14, ComponentLink6URL=https://datasheet.ciiva.com/7975/746258-7975835.pdf?src-supplier=Element14, Construction=Flat, Contact Plating=Tin, Depth=0.5mm, Halogen Free="Halogen Free", Height=0.5mm, Length=1mm, Manufacturer Part Number=TMK105B7103KV-F, Mount="Surface Mount", Packaging="Tape and Reel", Pricing 1="1 = 0.10000, 10 = 0.02200, 50 = 0.01180, 100 = 0.00960, 500 = 0.00684, 1000 = 0.00538, 2500 = 0.00489, 5000 = 0.00450 (USD)", REACH SVHC=Unknown, RoHS=Yes, RoHS Compliant=Yes, Series=M, Stock 1=711807, Supplier 1=Digi-Key, Termination=SMD/SMT, Thickness=0.022inch, Voltage Rating=25V, Voltage Rating (DC)=25V, Width=0.02inch
C2 C4 C6 C7 C10 C17 C18 C20 C22 C26 C27 C29: library part EMK105B7104KV-F, "0402 0.1 uF 16 V ±10% Tolerance X7R Multilayer Ceramic Chip Capacitor", Capacitance=100nF, Case/Package=0402, Case Code (Metric)=1005, Dielectric=X7R, Manufacturer="Taiyo Yuden", Max Operating Temperature=125°C, Min Operating Temperature=-55°C, Package Quantity=1, Resistor Type=Ceramic, Supplier Part Number 1=587-1451-1-ND, Tolerance=10%, Voltage Rating=16V, Case Code (Imperial)=0402, ComponentLink1Description=https://datasheet.ciiva.com/129/emk105b7104kv-f-ss-129714.pdf?src-supplier=Digi-Key, ComponentLink1URL=https://datasheet.ciiva.com/129/emk105b7104kv-f-ss-129714.pdf?src-supplier=Digi-Key, ComponentLink2Description=https://datasheet.ciiva.com/30227/emk105b7104kv-f-30227394.pdf?src-supplier=Onlinecomponents.com, ComponentLink2URL=https://datasheet.ciiva.com/30227/emk105b7104kv-f-30227394.pdf?src-supplier=Onlinecomponents.com, ComponentLink3Description=https://datasheet.ciiva.com/22748/746258-22748959.pdf?src-supplier=Element14, ComponentLink3URL=https://datasheet.ciiva.com/22748/746258-22748959.pdf?src-supplier=Element14, Construction=Flat, Depth=0.5mm, Halogen Free="Halogen Free", Height=0.5mm, Lead Free="Lead Free", Length=1mm, Manufacturer Part Number=EMK105B7104KV-F, Mount="Surface Mount", Number of Pins=2, Packaging="Tape and Reel", Pricing 1="1 = 0.10000, 10 = 0.02400, 50 = 0.01320, 100 = 0.01070, 500 = 0.00764, 1000 = 0.00601, 2500 = 0.00546, 5000 = 0.00503 (USD)", Radiation Hardening=No, REACH SVHC=Unknown, RoHS=Yes, RoHS Compliant=Yes, Series=M, Stock 1=4, Supplier 1=Digi-Key, Termination=SMD/SMT, Thickness=0.022inch, Voltage Rating (DC)=16V, Width=0.02inch
C8 C15 C25: library part 100R07X105KV4T, "Multilayer Ceramic Capacitor, Tanceram Series, 1 - F, - 10%, X5R, 10 V, 0402 [1005 Metric]", Capacitance=1uF, Case/Package=0402, Case Code (Metric)=1005, Dielectric=X5R, Manufacturer=Johanson, Max Operating Temperature=85°C, Min Operating Temperature=-55°C, Package Quantity=10000, Supplier Part Number 1=605-100R07X105KV4T, Tolerance=10%, Voltage Rating=10V, Case Code (Imperial)=0402, ComponentLink1Description=https://datasheet.ciiva.com/26948/getdatasheetpartid-789067-26948543.pdf?src-supplier=Verical, ComponentLink1URL=https://datasheet.ciiva.com/26948/getdatasheetpartid-789067-26948543.pdf?src-supplier=Verical, ComponentLink2Description=https://datasheet.ciiva.com/22693/jdi-full-catalog-2012-01-22693744.pdf?src-supplier=Element14, ComponentLink2URL=https://datasheet.ciiva.com/22693/jdi-full-catalog-2012-01-22693744.pdf?src-supplier=Element14, Depth=0.51mm, Height=0.64mm, Length=1.02mm, Manufacturer Part Number=100R07X105KV4T, Mount="Surface Mount", Number of Pins=2, Packaging="Tape and Reel", Pricing 1="1 = 0.28000, 10 = 0.19300, 50 = 0.19300, 100 = 0.09800, 1000 = 0.06000, 10000 = 0.04800 (USD)", Radiation Hardening=No, REACH SVHC="No SVHC", RoHS=Yes, RoHS Compliant=Yes, Series=TANCERAM®, Stock 1=57482, Supplier 1=Mouser, Termination=SMD/SMT, Thickness=0.025inch, Voltage Rating (DC)=10V, Weight=2.3E-05oz, Width=0.02inch
C11 C12: library part C1005C0G1H240J, "Capacitor Ceramic 24PF 50V, C0G, 5%, 0402, Full Reel", Case/Package=0402, Case Code (Metric)=1005, Dielectric=C0G, Dielectric Material=Ceramic, Manufacturer=TDK, Max Operating Temperature=125°C, Min Operating Temperature=-55°C, Package Quantity=1, Supplier Part Number 1=87R3204, Tolerance=5%, Voltage Rating=50V, Capacitance=24pF, Case Code (Imperial)=0402, ComponentLink1Description=https://datasheet.ciiva.com/161/c-series-generalappl-b11-161778.pdf?src-supplier=Digi-Key, ComponentLink1URL=https://datasheet.ciiva.com/161/c-series-generalappl-b11-161778.pdf?src-supplier=Digi-Key, ComponentLink2Description=https://datasheet.ciiva.com/161/c-series-generalappl-b11-161779.pdf?src-supplier=Digi-Key, ComponentLink2URL=https://datasheet.ciiva.com/161/c-series-generalappl-b11-161779.pdf?src-supplier=Digi-Key, ComponentLink3Description=https://datasheet.ciiva.com/161/c-series-generalappl-b11-161780.pdf?src-supplier=Digi-Key, ComponentLink3URL=https://datasheet.ciiva.com/161/c-series-generalappl-b11-161780.pdf?src-supplier=Digi-Key, ComponentLink4Description=https://datasheet.ciiva.com/5418/mlcc-commercial-general-en-5418382.pdf?src-supplier=Mouser, ComponentLink4URL=https://datasheet.ciiva.com/5418/mlcc-commercial-general-en-5418382.pdf?src-supplier=Mouser, Construction=Flat, Height=0.5mm, Length=0.039inch, Manufacturer Part Number=C1005C0G1H240J, Mount="Surface Mount", Number of Pins=2, Packaging="Tape and Reel", Resistor Type=Ceramic, RoHS=Yes, Series=C, Stock 1=0, Supplier 1=Newark, Termination=SMD/SMT, Thickness=0.022inch, Voltage Rating (DC)=50V, Width=0.02inch
C13 C14 C28 C30: library part GRM1555C1H100JZ01D, "Cap Ceramic 10pF 50V C0G 5% SMD 0402 125°C Paper T/R", Case/Package=0402, Case Code (Metric)=1005, Dielectric=C0G, Dielectric Material=Ceramic, Insulation Resistance=10GR, Manufacturer=Murata, Max Operating Temperature=125°C, Min Operating Temperature=-55°C, Package Quantity=1, Supplier Part Number 1=1118131, Temperature Coefficient=30ppm/°C, Tolerance=5%, Voltage=50V, Capacitance=10pF, Case Code (Imperial)=0402, ComponentLink1Description=https://datasheet.ciiva.com/129/partnumbering-e-01-129819.pdf?src-supplier=Digi-Key, ComponentLink1URL=https://datasheet.ciiva.com/129/partnumbering-e-01-129819.pdf?src-supplier=Digi-Key, ComponentLink2Description=https://datasheet.ciiva.com/129/partnumbering-e-01-129820.pdf?src-supplier=Digi-Key, ComponentLink2URL=https://datasheet.ciiva.com/129/partnumbering-e-01-129820.pdf?src-supplier=Digi-Key, ComponentLink3Description=https://datasheet.ciiva.com/129/partnumbering-e-01-129821.pdf?src-supplier=Digi-Key, ComponentLink3URL=https://datasheet.ciiva.com/129/partnumbering-e-01-129821.pdf?src-supplier=Digi-Key, ComponentLink4Description=https://datasheet.ciiva.com/19476/1855887-19476237.pdf?src-supplier=Jameco, ComponentLink4URL=https://datasheet.ciiva.com/19476/1855887-19476237.pdf?src-supplier=Jameco, ComponentLink5Description=https://datasheet.ciiva.com/18184/getdatasheetpartid-91958-18184166.pdf?src-supplier=Verical, ComponentLink5URL=https://datasheet.ciiva.com/18184/getdatasheetpartid-91958-18184166.pdf?src-supplier=Verical, ComponentLink6Description=https://datasheet.ciiva.com/11787/0900766b807a1cab-11787097.pdf?src-supplier=RSComponents, ComponentLink6URL=https://datasheet.ciiva.com/11787/0900766b807a1cab-11787097.pdf?src-supplier=RSComponents, ComponentLink7Description=https://datasheet.ciiva.com/6068/1747431-6068159.pdf?src-supplier=Farnell, ComponentLink7URL=https://datasheet.ciiva.com/6068/1747431-6068159.pdf?src-supplier=Farnell, ComponentLink8Description=https://datasheet.ciiva.com/11607/c02e-11607480.pdf?src-supplier=Avnet, ComponentLink8URL=https://datasheet.ciiva.com/11607/c02e-11607480.pdf?src-supplier=Avnet, ComponentLink9Description=https://datasheet.ciiva.com/14116/grmseries-tc-hitype-eng-14116856.pdf?src-supplier=Distrelec, ComponentLink9URL=https://datasheet.ciiva.com/14116/grmseries-tc-hitype-eng-14116856.pdf?src-supplier=Distrelec, ComponentLink10Description=https://datasheet.ciiva.com/14116/grmseries-tc-hitype-eng-14116917.pdf?src-supplier=Distrelec, ComponentLink10URL=https://datasheet.ciiva.com/14116/grmseries-tc-hitype-eng-14116917.pdf?src-supplier=Distrelec, ComponentLink11Description=https://datasheet.ciiva.com/7828/1747431-7828813.pdf?src-supplier=Element14, ComponentLink11URL=https://datasheet.ciiva.com/7828/1747431-7828813.pdf?src-supplier=Element14, ComponentLink12Description=https://datasheet.ciiva.com/7828/1747431-7828815.pdf?src-supplier=Element14, ComponentLink12URL=https://datasheet.ciiva.com/7828/1747431-7828815.pdf?src-supplier=Element14, Construction=Flat, Depth=0.5mm, Height=0.5mm, Lead Free="Lead Free", Length=1mm, Manufacturer Part Number=GRM1555C1H100JZ01D, Mount="Surface Mount", Number of Pins=2, Packaging="Tape and Reel", Pricing 1="1 = 37.68000, 3 = 28.53000 (GBP)", Radiation Hardening=No, REACH SVHC="No SVHC", RoHS=Yes, RoHS Compliant=Yes, Series=GRM, Size=0.5mm, Stock 1=0, Supplier 1=Farnell, Termination=SMD/SMT, Thickness=0.022inch, Voltage Rating=50V, Voltage Rating (DC)=50V, Width=0.5mm
D1: "LED Tri-Color Blue/Green/Red 475nm/531nm/631nm Chip LED 4-Pin SMD T/R", Color=Blue,Green,Red, Forward Voltage=3.3V, Manufacturer=Everlight, Manufacturer Part Number=18-038/RSGHBHC1-S03/2T, Supplier Part Number 1=18-038/RSGHBHC1-S03-2T, ComponentLink1Description=http://www.everlight.com/datasheets/18-038-RSGHBHC1-S01-2T.pdf?src-supplier=Avnet, ComponentLink1URL=http://www.everlight.com/datasheets/18-038-RSGHBHC1-S01-2T.pdf?src-supplier=Avnet, Lead Free="Lead Free", Lens Style=Clear, RoHS=No, Stock 1=0, Supplier 1=Avnet
D2: library part BAS70W-05-7-F, "BAS70W Series 70 V 70 mA Surface Mount Schottky Barrier Diode - SOT-323", Average Rectified Current=70mA, Capacitance=2pF, Case/Package=SOT-323, Forward Voltage=1V, Manufacturer=Diodes, Max Forward Surge Current (Ifsm)=100mA, Max Operating Temperature=125°C, Max Power Dissipation=200mW, Max Repetitive Reverse Voltage (Vrrm)=70V, Max Reverse Current=100nA, Min Operating Temperature=-55°C, Package Quantity=3000, Supplier Part Number 1=7513342P, ComponentLink1Description=https://datasheet.ciiva.com/8303/ds30113-8303106.pdf?src-supplier=Avnet, ComponentLink1URL=https://datasheet.ciiva.com/8303/ds30113-8303106.pdf?src-supplier=Avnet, ComponentLink2Description=https://datasheet.ciiva.com/4715/ds30113-42118-4715778.pdf?src-supplier=Mouser, ComponentLink2URL=https://datasheet.ciiva.com/4715/ds30113-42118-4715778.pdf?src-supplier=Mouser, ComponentLink3Description=https://datasheet.ciiva.com/16574/ds30113-16574275.pdf?src-supplier=Avnet+Europe, ComponentLink3URL=https://datasheet.ciiva.com/16574/ds30113-16574275.pdf?src-supplier=Avnet+Europe, ComponentLink4Description=https://datasheet.ciiva.com/6388/ds30113-6388462.pdf?src-supplier=Digi-Key, ComponentLink4URL=https://datasheet.ciiva.com/6388/ds30113-6388462.pdf?src-supplier=Digi-Key, Contact Plating=Tin,Matte, Current Rating=70mA, Element Configuration="Common Cathode", Forward Current=70mA, Height=1mm, Lead Free="Lead Free", Length=2.2mm, Manufacturer Part Number=BAS70W-05-7-F, Max Reverse Voltage (DC)=70V, Mount="Surface Mount", Number of Pins=3, Packaging="Tape and Reel", Peak Non-Repetitive Surge Current=100mA, Power Dissipation=200mW, Power Rating=200mW, Pricing 1="600 = 0.14900, 1500 = 0.11400 (GBP)", Radiation Hardening=No, Reverse Recovery Time=5ns, RoHS=Yes, RoHS Compliant=Yes, Series=-, Stock 1=400, Supplier 1=RSComponents, Termination=SMD/SMT, Voltage Rating (DC)=70V, Weight=0.000212oz, Width=1.35mm
D3: library part LTST-C171GKT, "Green 0805 130 º Min 5 mcd Typical 12 mcd Water Clear Lens SMT LED", Case/Package=0805, Case Code (Metric)=2012, Color=Green, Forward Current=30mA, Forward Voltage=2.1V, Lens Color=Colorless, Manufacturer="Vishay Lite-On", Max Operating Temperature=85°C, Min Operating Temperature=-55°C, Package Quantity=1, Power Dissipation=100mW, Reverse Voltage=5V, Supplier Part Number 1=6920935P, Test Current=10mA, Case Code (Imperial)=0805, ComponentLink1Description=https://datasheet.ciiva.com/2110/ltst-c171gkt-2110000.pdf?src-supplier=Digi-Key, ComponentLink1URL=https://datasheet.ciiva.com/2110/ltst-c171gkt-2110000.pdf?src-supplier=Digi-Key, ComponentLink2Description=https://datasheet.ciiva.com/11773/0900766b80dc0296-11773991.pdf?src-supplier=RSComponents, ComponentLink2URL=https://datasheet.ciiva.com/11773/0900766b80dc0296-11773991.pdf?src-supplier=RSComponents, ComponentLink3Description=https://datasheet.ciiva.com/12400/lite-on-ltst-c171gkt-190133-12400647.pdf?src-supplier=Mouser, ComponentLink3URL=https://datasheet.ciiva.com/12400/lite-on-ltst-c171gkt-190133-12400647.pdf?src-supplier=Mouser, ComponentLink4Description=https://datasheet.ciiva.com/2110/ltst-c171gkt-2110001.pdf?src-supplier=Digi-Key, ComponentLink4URL=https://datasheet.ciiva.com/2110/ltst-c171gkt-2110001.pdf?src-supplier=Digi-Key, ComponentLink5Description=https://datasheet.ciiva.com/2110/ltst-c171gkt-2110002.pdf?src-supplier=Digi-Key, ComponentLink5URL=https://datasheet.ciiva.com/2110/ltst-c171gkt-2110002.pdf?src-supplier=Digi-Key, ComponentLink6Description=https://datasheet.ciiva.com/16396/ltst-c171gkt-16396549.pdf?src-supplier=Future+Electronics, ComponentLink6URL=https://datasheet.ciiva.com/16396/ltst-c171gkt-16396549.pdf?src-supplier=Future+Electronics, Depth=1.25mm, Dominant Wavelength=569nm, Height=0.8mm, Illumination Color=Green, Lead Free="Lead Free", Length=2mm, Lens Style=Diffused,Colorless,Rectangular,Clear, Lens Transparency=Clear, Luminous Intensity=12mcd, Manufacturer Part Number=LTST-C171GKT, Mount="Surface Mount", Number of Elements=1, Number of LEDs=1, Number of Pins=2, Packaging="Tape and Reel", Power Rating=100mW, Pricing 1="250 = 0.05300, 500 = 0.05100, 1250 = 0.04300, 2500 = 0.04100 (GBP)", Radiation Hardening=No, RoHS=Yes, RoHS Compliant=Yes, Series="CHIPLED 0805", Stock 1=50050, Supplier 1=RSComponents, Viewing Angle=130°, Wavelength=585nm, Width=1.25mm
H1 H3 H4 H5 H6 H7 H8 H9 H10 H11 H12 H13 H15 H16 H17 H18: "Connector"
H2: "Header; PinStrip; CopperAlloy; HighTempThermoplastic; 2Cnts; 2A; Str; 961Series", Color=Black, Current Rating=2A, Flammability Rating="UL94 V-0", Manufacturer=3M, Max Operating Temperature=105°C, Min Operating Temperature=-25°C, Package Quantity=3000, Supplier Part Number 1=3M9457-02-ND, ComponentLink1Description=https://datasheet.ciiva.com/731/ts2181-731431.pdf?src-supplier=Digi-Key, ComponentLink1URL=https://datasheet.ciiva.com/731/ts2181-731431.pdf?src-supplier=Digi-Key, ComponentLink2Description=https://datasheet.ciiva.com/5724/ts2181-5724889.pdf?src-supplier=Farnell, ComponentLink2URL=https://datasheet.ciiva.com/5724/ts2181-5724889.pdf?src-supplier=Farnell, ComponentLink3Description=https://datasheet.ciiva.com/7997/ts2181-7997272.pdf?src-supplier=Element14, ComponentLink3URL=https://datasheet.ciiva.com/7997/ts2181-7997272.pdf?src-supplier=Element14, ComponentLink4Description=https://datasheet.ciiva.com/14617/70237733-14617125.pdf?src-supplier=Allied+Electronics, ComponentLink4URL=https://datasheet.ciiva.com/14617/70237733-14617125.pdf?src-supplier=Allied+Electronics, ComponentLink5Description=https://datasheet.ciiva.com/46428/1794052-46428554.pdf?src-supplier=Element14, ComponentLink5URL=https://datasheet.ciiva.com/46428/1794052-46428554.pdf?src-supplier=Element14, Connector Type=Header, Contact Finish - Mating=GOLD, Contact Gender=Male, Contact Material="Copper Alloy,Copper", Contact Mating Length=0.22inch, Contact Plating=Gold, Contact Post Length=3.3mm, Contact Shape=Square, Contact Type="Male Pin", Depth=2.5mm, Fastening Type=Pull, Gender=Male, Housing Color=Black, Housing Material=Thermoplastic, Insulation Color=Black, Insulation Material=Thermoplastic, Length=5.08mm, Manufacturer Part Number=961102-6404-AR, Max Current Rating=2A, Mount="Through Hole", Number of Contacts=2, Number of Positions=2, Number of Rows=1, Orientation=Straight, Packaging=Bulk, Pitch=2.54mm, Pricing 1="1 = 0.22000, 10 = 0.21000, 25 = 0.17920, 50 = 0.15680, 100 = 0.14560, 250 = 0.12880, 500 = 0.12320 (USD)", REACH SVHC=Unknown, RoHS=Yes, RoHS Compliant=Yes, Series=961, Stock 1=7305, Supplier 1=Digi-Key, Termination=Solder
J1 J2: "Tiger Buy Socket Strip With Pcb Tails, 0.100\" Pitch Rohs Compliant: Yes", Manufacturer=Samtec, Supplier Part Number 1=2079196, ComponentLink1Description=ftp://ftp.samtec.com/webfiles/PDF/SSQ_TH.PDF?src-supplier=Avnet, ComponentLink1URL=ftp://ftp.samtec.com/webfiles/PDF/SSQ_TH.PDF?src-supplier=Avnet, Contact Plating=Gold, Gender=Female, Manufacturer Part Number=SSW-110-23-S-D, Mount="Through Hole", Number of Contacts=20, Number of Rows=2, Packaging=Bulk, Pitch=2.54mm, Pricing 1="1 = 2.83000, 10 = 2.59000, 50 = 2.44000, 100 = 2.30000, 250 = 2.07000 (GBP)", Radiation Hardening=No, RoHS=Yes, RoHS Compliant=Yes, Stock 1=57, Supplier 1=RSComponents, Termination=Solder
J9 J11: "Conn Micro USB 2.0 Type B RCP 5 POS 0.65mm Solder RA SMD 5 Terminal 1 Port T/R", Current Rating=1A, Flammability Rating="UL94 V-0", Manufacturer=Hirose, Max Operating Temperature=85°C, Max Voltage Rating (AC)=30V, Min Operating Temperature=-30°C, Package Quantity=3500, Supplier Part Number 1=1645325, ComponentLink1Description=https://datasheet.ciiva.com/11731/0900766b80d9c4df-11731324.pdf?src-supplier=RSComponents, ComponentLink1URL=https://datasheet.ciiva.com/11731/0900766b80d9c4df-11731324.pdf?src-supplier=RSComponents, ComponentLink2Description=https://datasheet.ciiva.com/15181/getdatasheetpartid-449685-15181366.pdf?src-supplier=Verical, ComponentLink2URL=https://datasheet.ciiva.com/15181/getdatasheetpartid-449685-15181366.pdf?src-supplier=Verical, ComponentLink3Description=https://datasheet.ciiva.com/7646/81390-7646778.pdf?src-supplier=Element14, ComponentLink3URL=https://datasheet.ciiva.com/7646/81390-7646778.pdf?src-supplier=Element14, Connector Type=USB,Receptacle, Contact Material="Copper Alloy", Contact Plating=Gold, Depth=5.6mm, Gender=Receptacle, Lead Free="Lead Free", Length=7.9mm, Manufacturer Part Number=ZX62-B-5PA(11), Mating Cycles=10000, Mount="Surface Mount,Horizontal", Number of Contacts=5, Number of Ports=1, Number of Positions=5, Number of Terminals/Pins=5, Orientation="Right Angle", Packaging="Tape and Reel", Pitch=0.65mm, Pricing 1="10 = 0.60800, 50 = 0.48000, 100 = 0.44900, 250 = 0.43000, 500 = 0.39100, 1000 = 0.35900 (GBP)", Radiation Hardening=No, REACH SVHC="No SVHC", RoHS=Yes, RoHS Compliant=Yes, Series=ZX62, Stock 1=0, Supplier 1=Farnell, Termination=Solder, USB Standard="USB 2.0", Voltage Rating=30V, Voltage Rating (AC)=30V
Q1 Q2 T1: library part DTC114EET1G, "DTC114EET1G NPN Digi Transistor; 100mA 50 V 10 kOhm; Ratio Of 1; 3-Pin SOT-416", Case/Package=SOT-416, Collector-emitter Voltage-Max=250mV, Collector Emitter Breakdown Voltage=50V, Continuous Collector Current=100mA, Current Rating=70mA, Manufacturer="ON Semiconductor", Max Operating Temperature=150°C, Max Power Dissipation=200mW, Min Operating Temperature=-55°C, Output Voltage=300mV, Package Quantity=1, Supplier Part Number 1=DTC114EET1GOSDKR-ND, Collector Emitter Saturation Voltage=250mV, Collector Emitter Voltage (VCEO)=50V, ComponentLink1Description=https://datasheet.ciiva.com/15139/getdatasheetpartid-32044-15139553.pdf?src-supplier=Verical, ComponentLink1URL=https://datasheet.ciiva.com/15139/getdatasheetpartid-32044-15139553.pdf?src-supplier=Verical, ComponentLink2Description=https://datasheet.ciiva.com/989/dtc114e-d-989078.pdf?src-supplier=Digi-Key, ComponentLink2URL=https://datasheet.ciiva.com/989/dtc114e-d-989078.pdf?src-supplier=Digi-Key, ComponentLink3Description=https://datasheet.ciiva.com/989/dtc114e-d-989079.pdf?src-supplier=Digi-Key, ComponentLink3URL=https://datasheet.ciiva.com/989/dtc114e-d-989079.pdf?src-supplier=Digi-Key, ComponentLink4Description=https://datasheet.ciiva.com/989/dtc114e-d-989080.pdf?src-supplier=Digi-Key, ComponentLink4URL=https://datasheet.ciiva.com/989/dtc114e-d-989080.pdf?src-supplier=Digi-Key, ComponentLink5Description=https://datasheet.ciiva.com/11210/dtc124e-d-11210255.pdf?src-supplier=Avnet, ComponentLink5URL=https://datasheet.ciiva.com/11210/dtc124e-d-11210255.pdf?src-supplier=Avnet, ComponentLink6Description=https://datasheet.ciiva.com/16349/dtc114e-d-16349642.pdf?src-supplier=Future+Electronics, ComponentLink6URL=https://datasheet.ciiva.com/16349/dtc114e-d-16349642.pdf?src-supplier=Future+Electronics, ComponentLink7Description=https://datasheet.ciiva.com/22661/1813827-22661178.pdf?src-supplier=Element14, ComponentLink7URL=https://datasheet.ciiva.com/22661/1813827-22661178.pdf?src-supplier=Element14, Contact Plating=Tin,Matte, Element Configuration=Single, Halogen Free="Halogen Free", Height=0.75mm, hFE Min=35, Lead Free="Lead Free", Length=1.6mm, Manufacturer Part Number=DTC114EET1G, Max Breakdown Voltage=50V, Max Collector Current=100mA, Max Output Current=100mA, Number of Pins=3, Operating Supply Voltage=50V, Packaging="Tape and Reel", Polarity=NPN, Pricing 1="1 = 0.19000, 10 = 0.17300, 100 = 0.09400, 500 = 0.05784, 1000 = 0.03943 (USD)", Radiation Hardening=No, REACH SVHC="No SVHC", RoHS=Yes, RoHS Compliant=Yes, Series=-, Stock 1=0, Supplier 1=Digi-Key, Voltage Rating (DC)=50V, Width=0.8mm
R1 R3 R4 R10 R20 R24: library part RC0402FR-07330RL, "Res Thick Film 0402 330 Ohm 1% 0.063W(1/16W) ±100ppm/C Pad SMD T/R", Case/Package=0402, Case Code (Metric)=1005, Manufacturer=Yageo, Max Operating Temperature=155°C, Max Power Dissipation=63mW, Min Operating Temperature=-55°C, Package Quantity=1, Power Rating=62.5mW, Resistance=330R, Resistance Tolerance=1%, Resistor Type="Thick Film", Supplier Part Number 1=311-330LRCT-ND, Temperature Coefficient=100ppm/°C, Voltage Rating=50V, Case Code (Imperial)=0402, ComponentLink1Description=https://datasheet.ciiva.com/11819/0900766b80c66297-11819490.pdf?src-supplier=RSComponents, ComponentLink1URL=https://datasheet.ciiva.com/11819/0900766b80c66297-11819490.pdf?src-supplier=RSComponents, ComponentLink2Description=https://datasheet.ciiva.com/12656/pyu-rc0402-51-rohs-l-6-r-12656815.pdf?src-supplier=Mouser, ComponentLink2URL=https://datasheet.ciiva.com/12656/pyu-rc0402-51-rohs-l-6-r-12656815.pdf?src-supplier=Mouser, ComponentLink3Description=https://datasheet.ciiva.com/2453/pyu-r-int-thick-7-2453661.pdf?src-supplier=Digi-Key, ComponentLink3URL=https://datasheet.ciiva.com/2453/pyu-r-int-thick-7-2453661.pdf?src-supplier=Digi-Key, ComponentLink4Description=https://datasheet.ciiva.com/2453/pyu-r-int-thick-7-2453662.pdf?src-supplier=Digi-Key, ComponentLink4URL=https://datasheet.ciiva.com/2453/pyu-r-int-thick-7-2453662.pdf?src-supplier=Digi-Key, ComponentLink5Description=https://datasheet.ciiva.com/2453/pyu-r-int-thick-7-2453663.pdf?src-supplier=Digi-Key, ComponentLink5URL=https://datasheet.ciiva.com/2453/pyu-r-int-thick-7-2453663.pdf?src-supplier=Digi-Key, ComponentLink6Description=https://datasheet.ciiva.com/7849/1018594-7849962.pdf?src-supplier=Element14, ComponentLink6URL=https://datasheet.ciiva.com/7849/1018594-7849962.pdf?src-supplier=Element14, ComponentLink7Description=https://datasheet.ciiva.com/7849/1018594-7849963.pdf?src-supplier=Element14, ComponentLink7URL=https://datasheet.ciiva.com/7849/1018594-7849963.pdf?src-supplier=Element14, ComponentLink8Description=https://datasheet.ciiva.com/17083/pyu-rc0402-51-rohs-l-6-r-17083994.pdf?src-supplier=Future+Electronics, ComponentLink8URL=https://datasheet.ciiva.com/17083/pyu-rc0402-51-rohs-l-6-r-17083994.pdf?src-supplier=Future+Electronics, Construction=Rectangular, Depth=0.5mm, Features="Moisture Resistant", Height=0.016inch, Lead Free="Lead Free", Length=0.039inch, Manufacturer Part Number=RC0402FR-07330RL, Military Standard=Not, Number of Terminations=2, Packaging="Tape and Reel", Pricing 1="1 = 0.10000, 10 = 0.01600, 100 = 0.00660, 1000 = 0.00299, 2500 = 0.00259, 5000 = 0.00214 (USD)", REACH SVHC=Unknown, RoHS=Yes, RoHS Compliant=Yes, Series=RC, Size Code=0402, Stock 1=664783, Supplier 1=Digi-Key, Technology="THICK FILM", Termination=SMD/SMT, Tolerance=1%, Width=0.02inch
R2 R5 R8 R11 R14 R15 R16 R17 R18 R19 R21 R25 R29: library part ERJ-3GEY0R00V, "ERJ Series 0603 0 Ohm 0.1 W Jumper Surface Mount Thick Film Chip Resistor", Case/Package=0603, Case Code (Metric)=1608, Manufacturer=Panasonic, Max Operating Temperature=155°C, Max Power Dissipation=100mW, Min Operating Temperature=-55°C, Package Quantity=1, Resistance=0R, Resistor Type="Thick Film", Supplier Part Number 1=9028511, Temperature Coefficient=600ppm/°C, Tolerance=0%, Voltage Rating=75V, Voltage Rating (DC)=50V, Case Code (Imperial)=0603, ComponentLink1Description=https://datasheet.ciiva.com/11808/0900766b80f806dd-11808207.pdf?src-supplier=RSComponents, ComponentLink1URL=https://datasheet.ciiva.com/11808/0900766b80f806dd-11808207.pdf?src-supplier=RSComponents, ComponentLink2Description=https://datasheet.ciiva.com/27055/1935748-27055113.pdf?src-supplier=Jameco, ComponentLink2URL=https://datasheet.ciiva.com/27055/1935748-27055113.pdf?src-supplier=Jameco, ComponentLink3Description=https://datasheet.ciiva.com/48532/aoa0000ce1-48532165.pdf?src-supplier=Avnet, ComponentLink3URL=https://datasheet.ciiva.com/48532/aoa0000ce1-48532165.pdf?src-supplier=Avnet, ComponentLink4Description=https://datasheet.ciiva.com/5959/1678796-5959707.pdf?src-supplier=Farnell, ComponentLink4URL=https://datasheet.ciiva.com/5959/1678796-5959707.pdf?src-supplier=Farnell, ComponentLink5Description=https://datasheet.ciiva.com/43460/1678796-43460647.pdf?src-supplier=Farnell, ComponentLink5URL=https://datasheet.ciiva.com/43460/1678796-43460647.pdf?src-supplier=Farnell, ComponentLink6Description=https://datasheet.ciiva.com/9198/aoa0000ce1-9198975.pdf?src-supplier=Avnet, ComponentLink6URL=https://datasheet.ciiva.com/9198/aoa0000ce1-9198975.pdf?src-supplier=Avnet, ComponentLink7Description=https://datasheet.ciiva.com/30199/4aoa0000ce1-30199822.pdf?src-supplier=Onlinecomponents.com, ComponentLink7URL=https://datasheet.ciiva.com/30199/4aoa0000ce1-30199822.pdf?src-supplier=Onlinecomponents.com, ComponentLink8Description=https://datasheet.ciiva.com/16758/70255313-16758527.pdf?src-supplier=Allied+Electronics, ComponentLink8URL=https://datasheet.ciiva.com/16758/70255313-16758527.pdf?src-supplier=Allied+Electronics, ComponentLink9Description=https://datasheet.ciiva.com/16834/aoa0000ce1-16834828.pdf?src-supplier=Future+Electronics, ComponentLink9URL=https://datasheet.ciiva.com/16834/aoa0000ce1-16834828.pdf?src-supplier=Future+Electronics, ComponentLink10Description=https://datasheet.ciiva.com/46377/1678796-46377868.pdf?src-supplier=Element14, ComponentLink10URL=https://datasheet.ciiva.com/46377/1678796-46377868.pdf?src-supplier=Element14, ComponentLink11Description=https://datasheet.ciiva.com/28695/1678796-28695833.pdf?src-supplier=Element14, ComponentLink11URL=https://datasheet.ciiva.com/28695/1678796-28695833.pdf?src-supplier=Element14, ComponentLink12Description=https://datasheet.ciiva.com/17215/aoa0000ce1-17215388.pdf?src-supplier=Avnet+Europe, ComponentLink12URL=https://datasheet.ciiva.com/17215/aoa0000ce1-17215388.pdf?src-supplier=Avnet+Europe, Construction=Rectangular, Contact Plating=Tin, Depth=0.8mm, Features="Automotive AEC-Q200", Height=0.45mm, Lead Free="Lead Free", Length=1.6mm, Manufacturer Part Number=ERJ-3GEY0R00V, Military Standard=Not, Mount="Surface Mount", Number of Terminations=2, Packaging="Tape and Reel", Power Rating=100mW, Pricing 1="5000 = 0.01170 (USD)", Radiation Hardening=No, REACH SVHC="No SVHC", RoHS=Yes, RoHS Compliant=Yes, Series=ERJ, Size Code=0603, Stock 1=5000, Supplier 1="Future Electronics", Technology="THICK FILM", Termination=SMD/SMT, Width=0.031inch
R6 R12: library part MCR01MRTF1004, "Res Thick Film 0402 1M Ohm 1% 0.063W(1/16W) ±100ppm/C Pad SMD T/R", Case/Package=0402, Case Code (Metric)=1005, Manufacturer=Rohm, Max Operating Temperature=155°C, Max Power Dissipation=63mW, Min Operating Temperature=-55°C, Package Quantity=1, Resistance=1MR, Resistor Type="Thick Film", Supplier Part Number 1=RHM1.00MCDCT-ND, Temperature Coefficient=100ppm/°C, Tolerance=1%, Voltage Rating (DC)=50V, Case Code (Imperial)=0402, ComponentLink1Description=https://datasheet.ciiva.com/2519/mcr01mrt-seriesspec-2519945.pdf?src-supplier=Digi-Key, ComponentLink1URL=https://datasheet.ciiva.com/2519/mcr01mrt-seriesspec-2519945.pdf?src-supplier=Digi-Key, ComponentLink2Description=https://datasheet.ciiva.com/2519/mcr01mrt-seriesspec-2519946.pdf?src-supplier=Digi-Key, ComponentLink2URL=https://datasheet.ciiva.com/2519/mcr01mrt-seriesspec-2519946.pdf?src-supplier=Digi-Key, ComponentLink3Description=https://datasheet.ciiva.com/2519/mcr01mrt-seriesspec-2519947.pdf?src-supplier=Digi-Key, ComponentLink3URL=https://datasheet.ciiva.com/2519/mcr01mrt-seriesspec-2519947.pdf?src-supplier=Digi-Key, Height=0.016inch, Lead Free="Lead Free", Length=0.039inch, Manufacturer Part Number=MCR01MRTF1004, Number of Terminations=2, Packaging="Tape and Reel", RoHS=Yes, RoHS Compliant=Yes, Series=MCR, Stock 1=0, Supplier 1=Digi-Key, Width=0.02inch
R7 R9 R13 R22 R23 R26 R27 R28: library part RC0402FR-0710KL, "Res General Purpose Thick Film 0402 10K Ohm 1% 1/16W ±100ppm/°C Molded SMD Paper T/R", Case/Package=0402, Case Code (Metric)=1005, Manufacturer=Yageo, Max Operating Temperature=155°C, Max Power Dissipation=63mW, Min Operating Temperature=-55°C, Power Rating=62.5mW, Resistance=10kR, Resistance Tolerance=1%, Resistor Type="Thick Film", Supplier Part Number 1=1987644P, Temperature Coefficient=100ppm/°C, Voltage Rating=50V, Case Code (Imperial)=0402, ComponentLink1Description=https://datasheet.ciiva.com/7660/38568-7660787.pdf?src-supplier=Element14, ComponentLink1URL=https://datasheet.ciiva.com/7660/38568-7660787.pdf?src-supplier=Element14, ComponentLink2Description=https://datasheet.ciiva.com/12667/pyu-rc0402-51-rohs-l-6-r-12667067.pdf?src-supplier=Mouser, ComponentLink2URL=https://datasheet.ciiva.com/12667/pyu-rc0402-51-rohs-l-6-r-12667067.pdf?src-supplier=Mouser, ComponentLink3Description=https://datasheet.ciiva.com/7849/1784430-7849813.pdf?src-supplier=Element14, ComponentLink3URL=https://datasheet.ciiva.com/7849/1784430-7849813.pdf?src-supplier=Element14, ComponentLink4Description=https://datasheet.ciiva.com/7849/1686128-7849814.pdf?src-supplier=Element14, ComponentLink4URL=https://datasheet.ciiva.com/7849/1686128-7849814.pdf?src-supplier=Element14, ComponentLink5Description=https://datasheet.ciiva.com/7849/1784430-7849815.pdf?src-supplier=Element14, ComponentLink5URL=https://datasheet.ciiva.com/7849/1784430-7849815.pdf?src-supplier=Element14, ComponentLink6Description=https://datasheet.ciiva.com/7983/1018594-7983486.pdf?src-supplier=Element14, ComponentLink6URL=https://datasheet.ciiva.com/7983/1018594-7983486.pdf?src-supplier=Element14, ComponentLink7Description=https://datasheet.ciiva.com/22747/1018594-22747512.pdf?src-supplier=Element14, ComponentLink7URL=https://datasheet.ciiva.com/22747/1018594-22747512.pdf?src-supplier=Element14, Construction=Rectangular, Depth=0.5mm, Features="Moisture Resistant", Height=0.32mm, Lead Free="Lead Free", Lead Pitch=0.2mm, Length=1mm, Manufacturer Part Number=RC0402FR-0710KL, Military Standard=Not, Number of Pins=2, Number of Terminations=2, Packaging="Tape and Reel", Pricing 1="1000 = 0.03100, 2000 = 0.02800, 5000 = 0.02300 (GBP)", REACH SVHC="No SVHC", RoHS=Yes, RoHS Compliant=Yes, Series=RC, Stock 1=29900, Supplier 1=RSComponents, Termination=SMD/SMT, Tolerance=1%, Voltage Rating (DC)=50V, Width=0.5mm, Working Voltage=50V
RESET1 SW1 SW2: "Switch Tactile N.O. SPST Round Button Gull Wing 0.05A 24VDC 500000Cycles 1.57N SMD Bag", Actuator Color=Beige, Contact Current Rating=50mA, Contact Resistance=100mR, Insulation Resistance=100MR, Manufacturer=Omron, Max Operating Temperature=70°C, Max Voltage Rating (DC)=24V, Min Operating Temperature=-25°C, Operating Force=1.57N, Package Quantity=1500, Ratings="IP67,Waterproof,Dust Tight", Supplier Part Number 1=SW415-ND, Actuator Length=0.55mm, Actuator Type=Standard, ComponentLink1Description=https://datasheet.ciiva.com/14142/b3s-eng-datasheet-14142433.pdf?src-supplier=Distrelec, ComponentLink1URL=https://datasheet.ciiva.com/14142/b3s-eng-datasheet-14142433.pdf?src-supplier=Distrelec, ComponentLink2Description=https://datasheet.ciiva.com/20148/78-0141-20148379.pdf?src-supplier=Rapid+Electronics, ComponentLink2URL=https://datasheet.ciiva.com/20148/78-0141-20148379.pdf?src-supplier=Rapid+Electronics, ComponentLink3Description=https://datasheet.ciiva.com/26883/getdatasheetpartid-240626-26883382.pdf?src-supplier=Verical, ComponentLink3URL=https://datasheet.ciiva.com/26883/getdatasheetpartid-240626-26883382.pdf?src-supplier=Verical, ComponentLink4Description=https://datasheet.ciiva.com/2900/b3s-1110-2900062.pdf?src-supplier=Digi-Key, ComponentLink4URL=https://datasheet.ciiva.com/2900/b3s-1110-2900062.pdf?src-supplier=Digi-Key, ComponentLink5Description=https://datasheet.ciiva.com/14539/70175262-14539005.pdf?src-supplier=Allied+Electronics, ComponentLink5URL=https://datasheet.ciiva.com/14539/70175262-14539005.pdf?src-supplier=Allied+Electronics, ComponentLink6Description=https://datasheet.ciiva.com/16155/en-b3s-16155005.pdf?src-supplier=Onlinecomponents.com, ComponentLink6URL=https://datasheet.ciiva.com/16155/en-b3s-16155005.pdf?src-supplier=Onlinecomponents.com, ComponentLink7Description=https://datasheet.ciiva.com/1532/1683347-1532667.pdf?src-supplier=Element14, ComponentLink7URL=https://datasheet.ciiva.com/1532/1683347-1532667.pdf?src-supplier=Element14, ComponentLink8Description=https://datasheet.ciiva.com/30227/en-b3s-30227246.pdf?src-supplier=Onlinecomponents.com, ComponentLink8URL=https://datasheet.ciiva.com/30227/en-b3s-30227246.pdf?src-supplier=Onlinecomponents.com, Contact Material=Bronze, Contact Plating=Silver, Current Rating=50mA, Depth=9mm, Electrical Life=500000Cycles, Illumination Type=Non-Illuminated,Illuminated, Lead Free="Lead Free", Length=6.6mm, Manufacturer Part Number=B3S-1000, Max Current Rating=50mA, Mechanical Life=500000Cycles, Mount="Surface Mount", Number of Poles=1, Orientation=Straight, Packaging=Bulk, Pricing 1="1 = 0.70000, 10 = 0.67800, 25 = 0.65160, 100 = 0.56570, 250 = 0.51620, 500 = 0.47968, 1000 = 0.45622 (USD)", REACH SVHC="No SVHC", RoHS=Yes, RoHS Compliant=Yes, Series=B3S, Stock 1=0, Supplier 1=Digi-Key, Switch Function=Off-Mom, Switch Travel=0.25mm, Termination="Gull Wing", Throw Configuration=SPST, Voltage Rating (DC)=24V, Weight=0.010582oz, Width=6mm